# EAGLE board Battery Interface Module (EAGLE 5.12), part 1 of 3
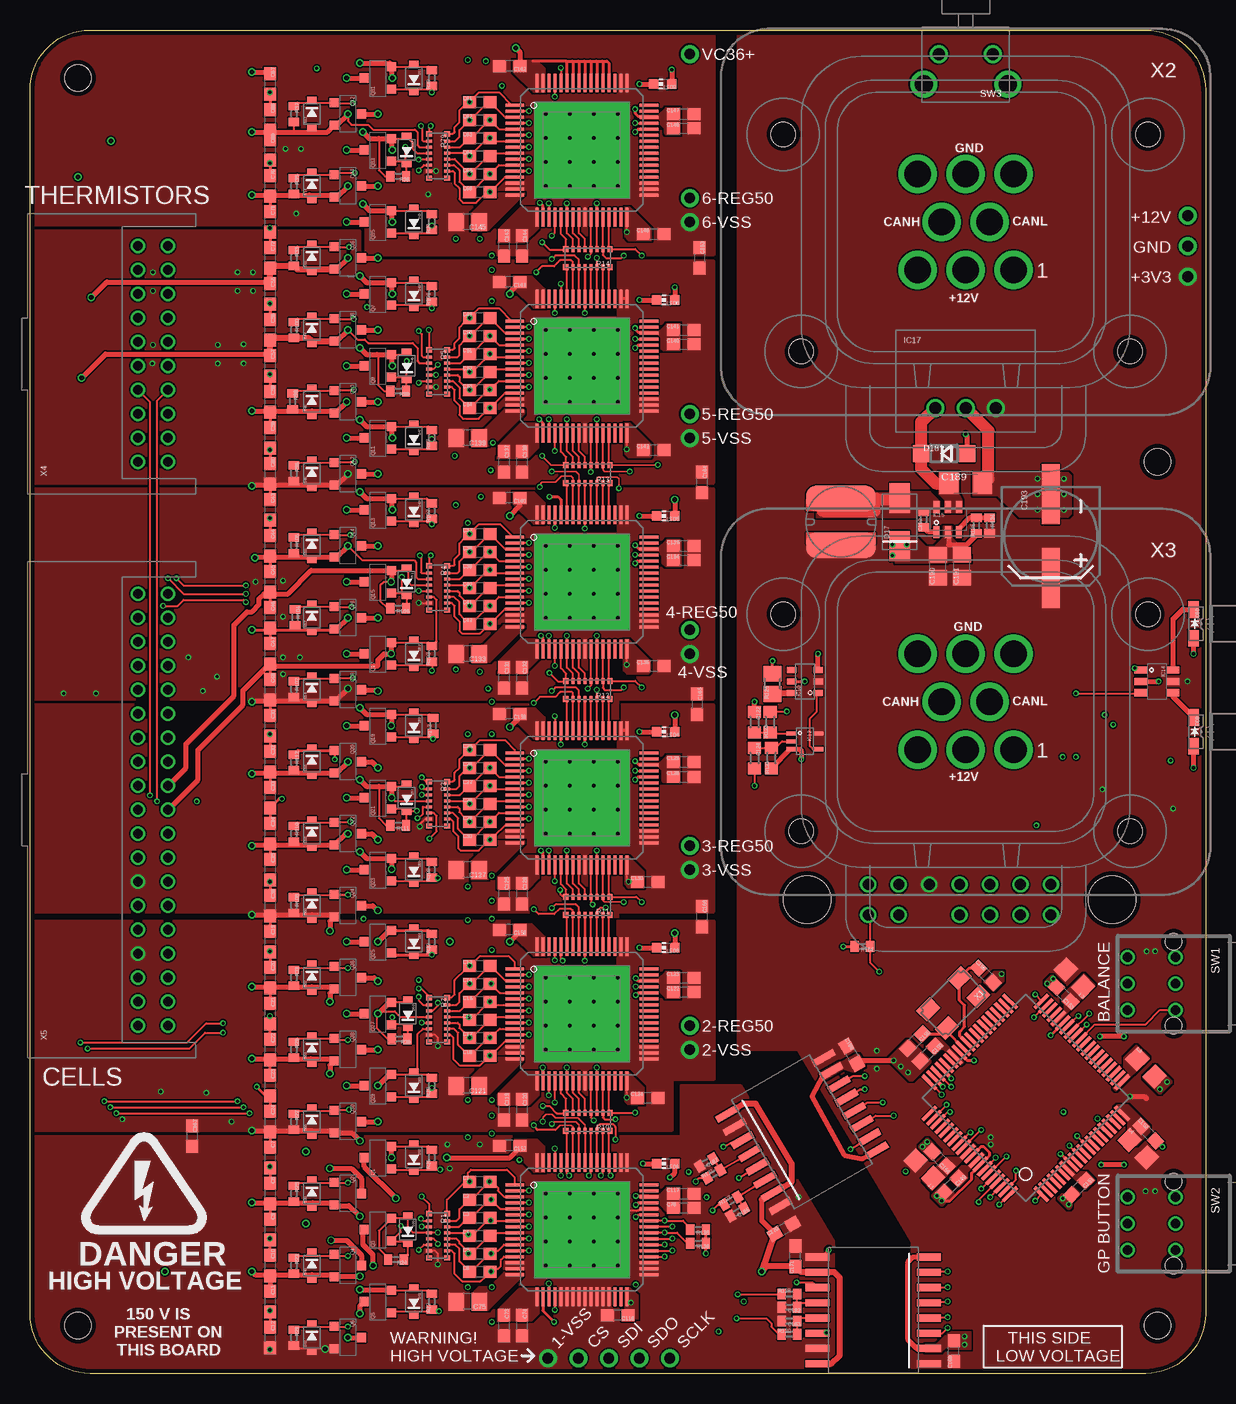
[diagram p0: board, top side]
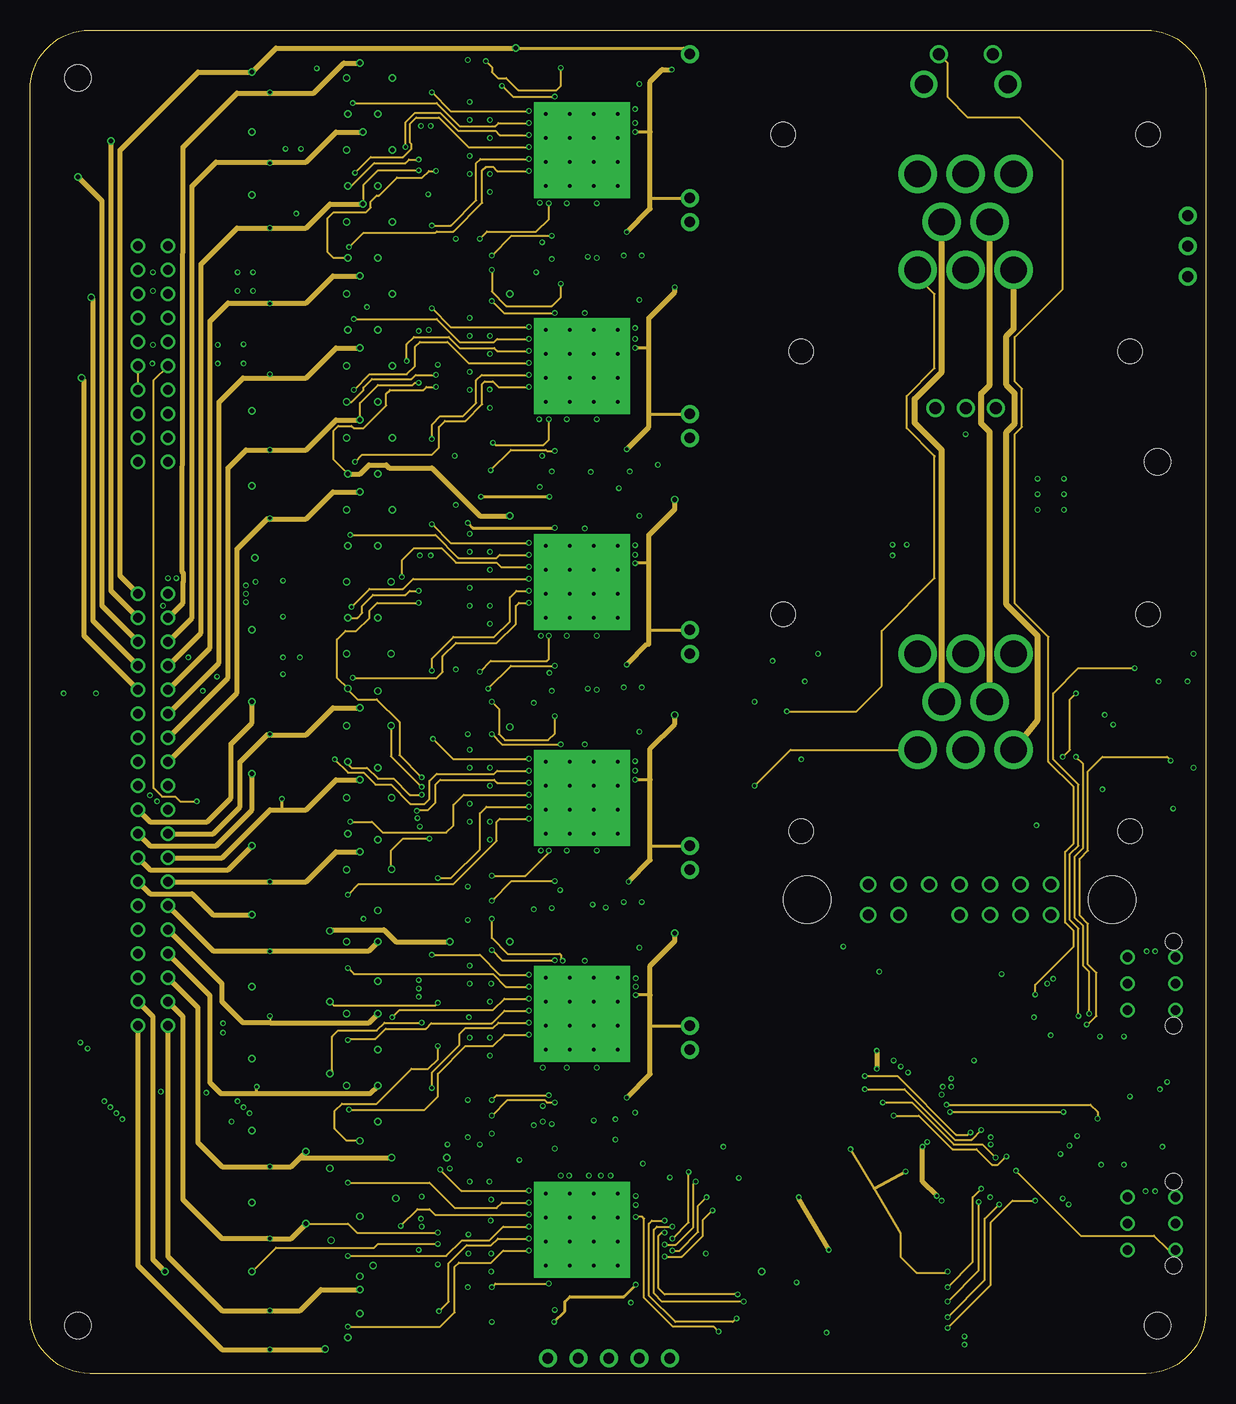
[diagram p1: board, inner layer Route2]
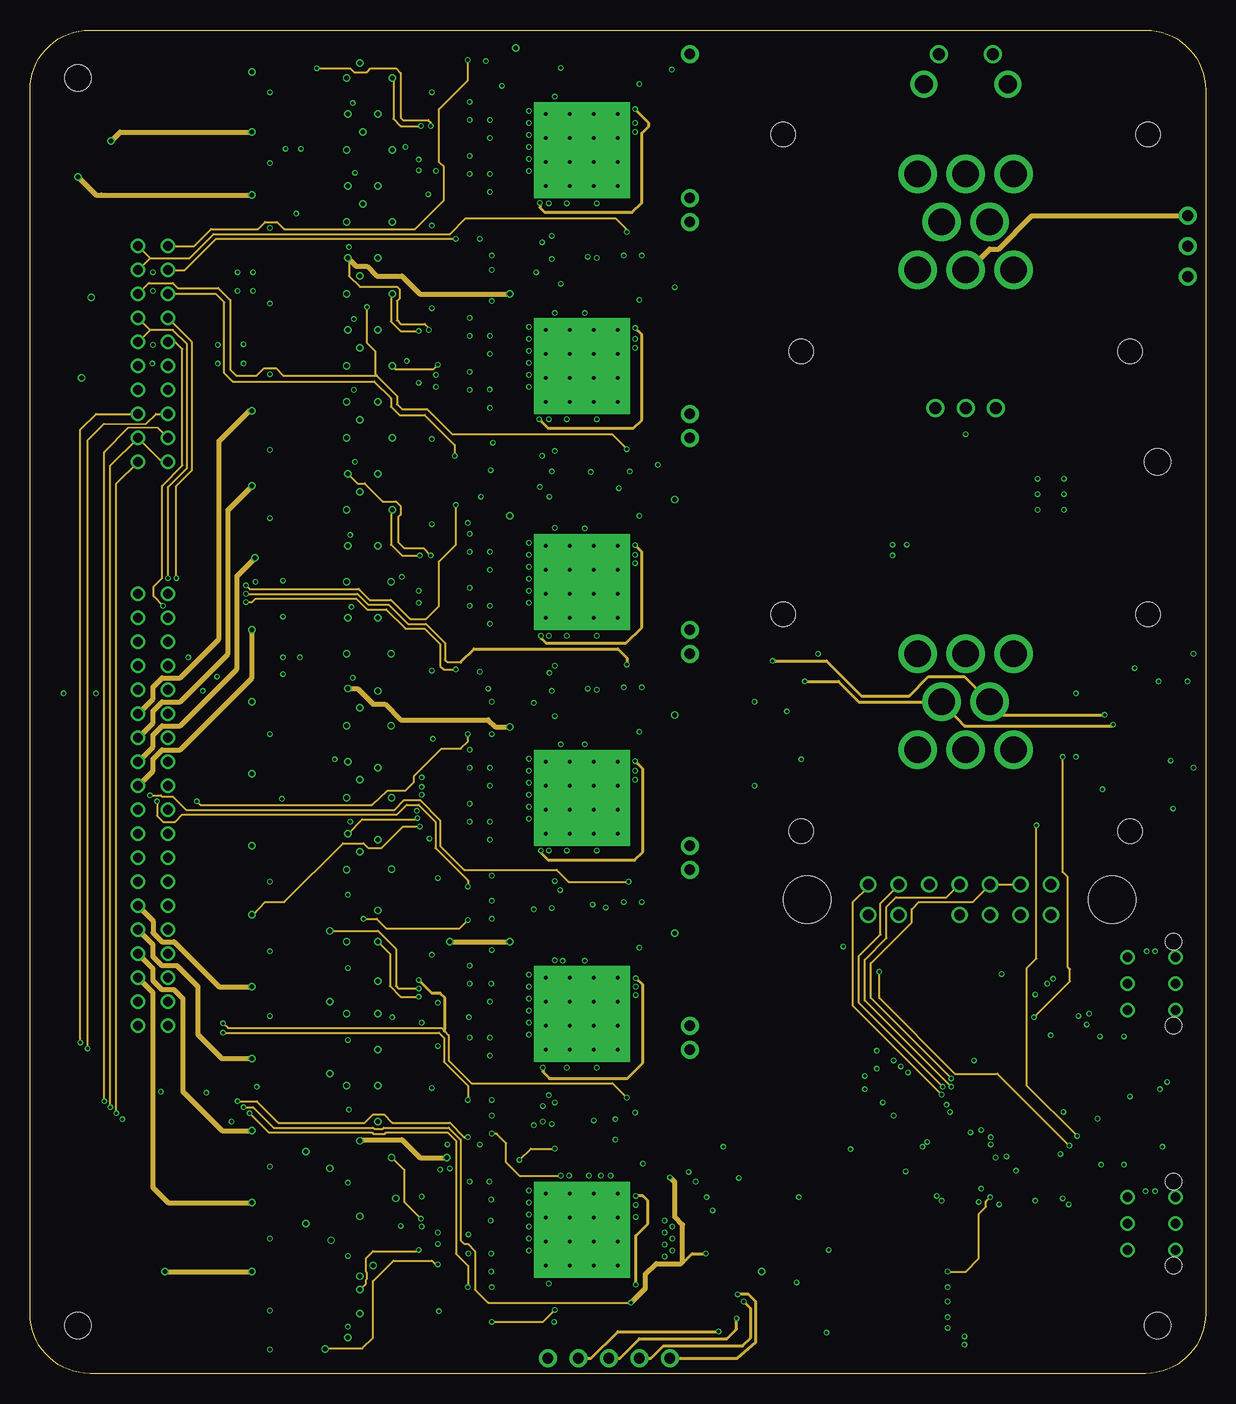
[diagram p2: board, inner layer Route15]
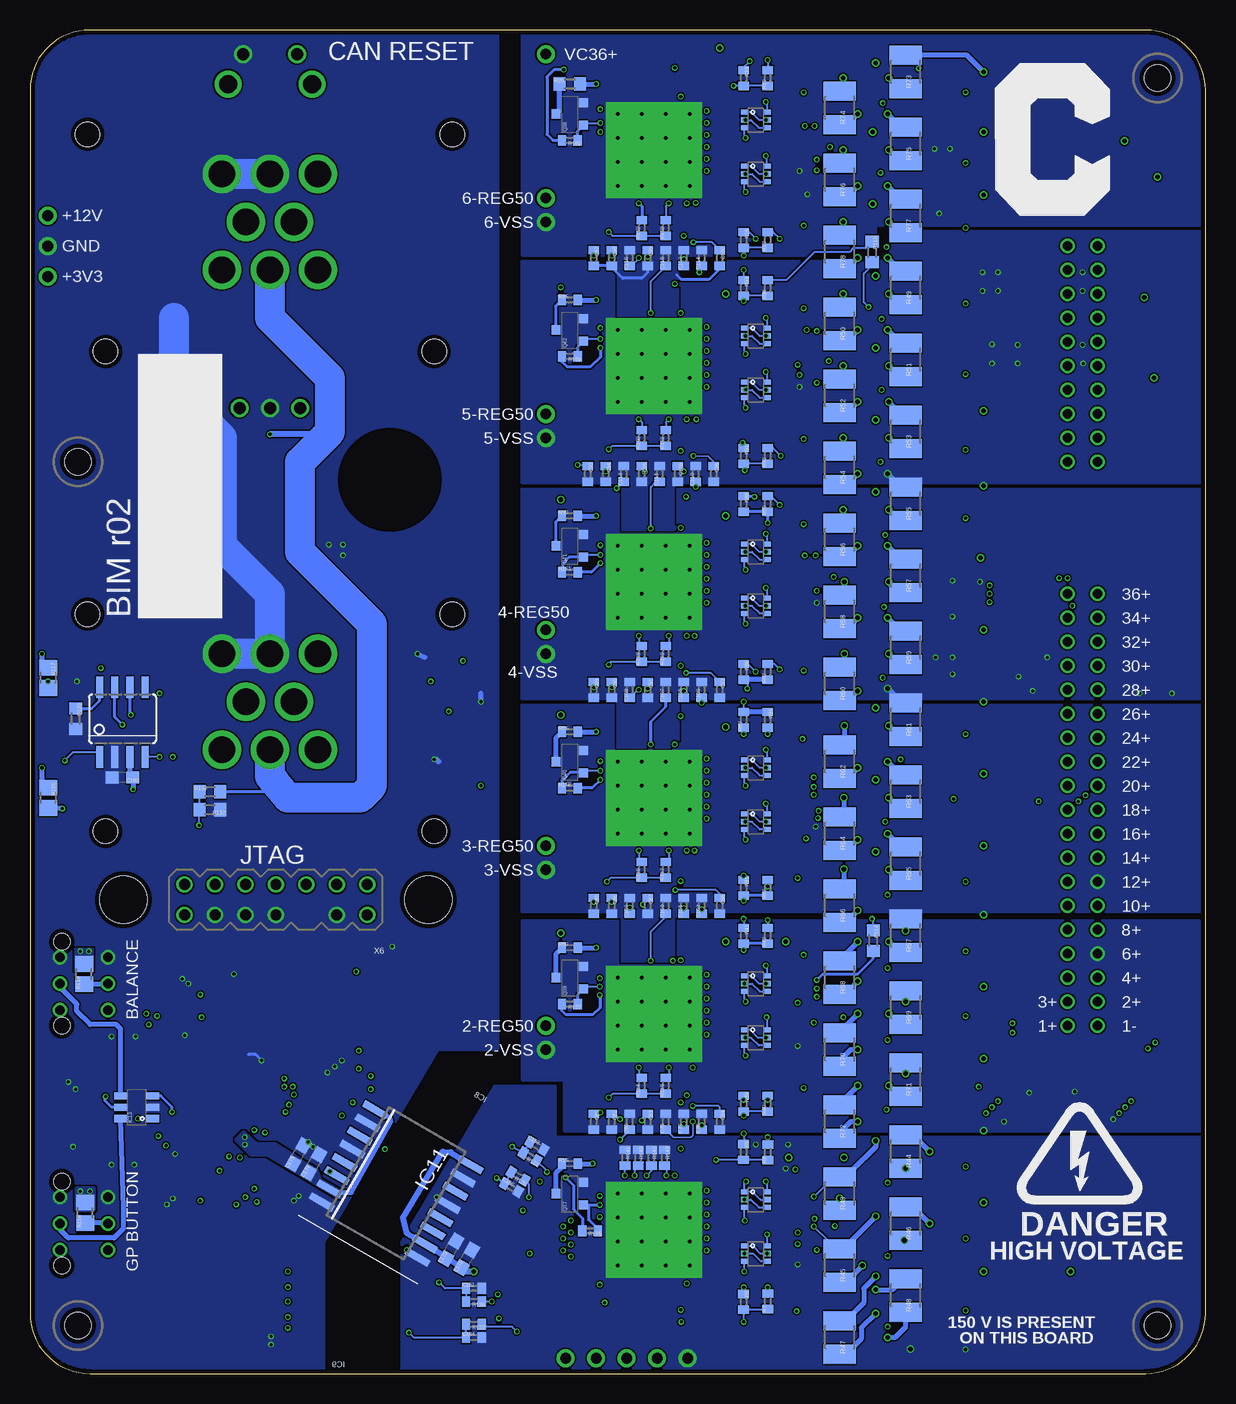
[diagram p3: board, bottom side, seen from below]

Size 98 x 112 mm. Coordinates in mm from the lower left corner, seen from the top.
Outline: 5,0 arc-90 0,5 0,107 arc-90 5,112 93,112 arc-90 98,107 98,5 arc-90 93,0 5,0
Copper layers (1+2*15+16): Top 0.0356mm / dielectric 0.1702mm / Route2 0.0178mm / dielectric 1.1938mm / Route15 0.0178mm / dielectric 0.1981mm / Bottom 0.0356mm
Design rules "OSH Park 4-layer (draft) 5-5": minimum track width 5mil, minimum drill 10mil, track to track 5mil, track to pad 5mil, pad to pad 5mil, via to via 5mil, smd to smd 5mil, copper to edge 15mil, drill to drill 8mil, minimum pad ring 4mil, minimum via ring 4mil, stop-mask expansion 4mil, vias tented up to drill 20mil, thermal gap 10mil
Holes 2.2 mm at 4,4 4,108 94,76 94,4
Holes 3.96 mm at 64.8,39.5 90.2,39.5
bKeepout: area 91,105 to 97,111; area 91,1 to 97,7; area 1,1 to 7,7; area 1,105 to 7,111
tRestrict: area 66.4,10.1 to 66.8,10.5
bRestrict: area 66.3,10 to 66.9,10.6

## Footprints (pad centres in the part's own frame; a part is rotated, then mirrored left to right if it is on the bottom)
C0603 = smd 1.1 x 1: 1 -0.85,0; 2 0.85,0
C0805 = smd 1.3 x 1.5: 1 -0.95,0; 2 0.95,0
C0402 = smd 0.7 x 0.9: 1 -0.65,0; 2 0.65,0
C1206 = smd 1.6 x 1.8: 1 -1.4,0; 2 1.4,0
175TMP-0810 = smd 5 x 1.5: + 3.5,0; - -3.5,0
SOT-363 = smd 0.42 x 0.6: 1 -0.65,-0.95; 2 0,-0.95; 3 0.65,-0.95; 4 0.65,0.95; 5 0,0.95; 6 -0.65,0.95
SOD-323 = smd 0.63 x 0.83: ANODE -1.115,0; CATHODE 1.115,0
SMA = smd 2.5 x 1.7: ANODE -2,0; CATHODE 2,0
SOD123 = smd 1.4 x 1.4: A 1.9,0; C -1.9,0
LQFP64-POWERPAD_(S-PQFP-G64) = smd 1.55 x 0.25: 1 -5.6,3.75; 2 -5.6,3.25; 3 -5.6,2.75; 4 -5.6,2.25; 5 -5.6,1.75; 6 -5.6,1.25; 7 -5.6,0.75; 8 -5.6,0.25; 9 -5.6,-0.25; 10 -5.6,-0.75; 11 -5.6,-1.25; 12 -5.6,-1.75; 13 -5.6,-2.25; 14 -5.6,-2.75; 15 -5.6,-3.25; 16 -5.6,-3.75; 33 5.6,-3.75; 34 5.6,-3.25; 35 5.6,-2.75; 36 5.6,-2.25; 37 5.6,-1.75; 38 5.6,-1.25; 39 5.6,-0.75; 40 5.6,-0.25; 41 5.6,0.25; 42 5.6,0.75; 43 5.6,1.25; 44 5.6,1.75; 45 5.6,2.25; 46 5.6,2.75; 47 5.6,3.25; 48 5.6,3.75 | smd 0.25 x 1.55: 17 -3.75,-5.6; 18 -3.25,-5.6; 19 -2.75,-5.6; 20 -2.25,-5.6; 21 -1.75,-5.6; 22 -1.25,-5.6; 23 -0.75,-5.6; 24 -0.25,-5.6; 25 0.25,-5.6; 26 0.75,-5.6; 27 1.25,-5.6; 28 1.75,-5.6; 29 2.25,-5.6; 30 2.75,-5.6; 31 3.25,-5.6; 32 3.75,-5.6; 49 3.75,5.6; 50 3.25,5.6; 51 2.75,5.6; 52 2.25,5.6; 53 1.75,5.6; 54 1.25,5.6; 55 0.75,5.6; 56 0.25,5.6; 57 -0.25,5.6; 58 -0.75,5.6; 59 -1.25,5.6; 60 -1.75,5.6; 61 -2.25,5.6; 62 -2.75,5.6; 63 -3.25,5.6; 64 -3.75,5.6
PQFP-80_(S-PQFP-G80) = smd 0.3 x 1.6: 1 -4.75,-6.6; 2 -4.25,-6.6; 3 -3.75,-6.6; 4 -3.25,-6.6; 5 -2.75,-6.6; 6 -2.25,-6.6; 7 -1.75,-6.6; 8 -1.25,-6.6; 9 -0.75,-6.6; 10 -0.25,-6.6; 11 0.25,-6.6; 12 0.75,-6.6; 13 1.25,-6.6; 14 1.75,-6.6; 15 2.25,-6.6; 16 2.75,-6.6; 17 3.25,-6.6; 18 3.75,-6.6; 19 4.25,-6.6; 20 4.75,-6.6; 41 4.75,6.6; 42 4.25,6.6; 43 3.75,6.6; 44 3.25,6.6; 45 2.75,6.6; 46 2.25,6.6; 47 1.75,6.6; 48 1.25,6.6; 49 0.75,6.6; 50 0.25,6.6; 51 -0.25,6.6; 52 -0.75,6.6; 53 -1.25,6.6; 54 -1.75,6.6; 55 -2.25,6.6; 56 -2.75,6.6; 57 -3.25,6.6; 58 -3.75,6.6; 59 -4.25,6.6; 60 -4.75,6.6 | smd 1.6 x 0.3: 21 6.6,-4.75; 22 6.6,-4.25; 23 6.6,-3.75; 24 6.6,-3.25; 25 6.6,-2.75; 26 6.6,-2.25; 27 6.6,-1.75; 28 6.6,-1.25; 29 6.6,-0.75; 30 6.6,-0.25; 31 6.6,0.25; 32 6.6,0.75; 33 6.6,1.25; 34 6.6,1.75; 35 6.6,2.25; 36 6.6,2.75; 37 6.6,3.25; 38 6.6,3.75; 39 6.6,4.25; 40 6.6,4.75; 61 -6.6,4.75; 62 -6.6,4.25; 63 -6.6,3.75; 64 -6.6,3.25; 65 -6.6,2.75; 66 -6.6,2.25; 67 -6.6,1.75; 68 -6.6,1.25; 69 -6.6,0.75; 70 -6.6,0.25; 71 -6.6,-0.25; 72 -6.6,-0.75; 73 -6.6,-1.25; 74 -6.6,-1.75; 75 -6.6,-2.25; 76 -6.6,-2.75; 77 -6.6,-3.25; 78 -6.6,-3.75; 79 -6.6,-4.25; 80 -6.6,-4.75
D_(R-PDSO-G16) = smd 2 x 0.6: 1 -4.65,4.445; 2 -4.65,3.175; 3 -4.65,1.905; 4 -4.65,0.635; 5 -4.65,-0.635; 6 -4.65,-1.905; 7 -4.65,-3.175; 8 -4.65,-4.445; 9 4.65,-4.445; 10 4.65,-3.175; 11 4.65,-1.905; 12 4.65,-0.635; 13 4.65,0.635; 14 4.65,1.905; 15 4.65,3.175; 16 4.65,4.445
SOT23-6_(RJ-6) = smd 0.5 x 0.8: 1 -0.95,-1.1; 2 0,-1.1; 3 0.95,-1.1; 4 0.95,1.1; 5 0,1.1; 6 -0.95,1.1
SO-16W = smd 0.6 x 2.2: 1 -4.445,-3.33; 2 -3.175,-3.33; 3 -1.905,-3.33; 4 -0.635,-3.33; 5 0.635,-3.33; 6 1.905,-3.33; 7 3.175,-3.33; 8 4.445,-3.33; 9 4.445,5.87; 10 3.175,5.87; 11 1.905,5.87; 12 0.635,5.87; 13 -0.635,5.87; 14 -1.905,5.87; 15 -3.175,5.87; 16 -4.445,5.87
DCK_(R-PDSO-G5) = smd 0.35 x 0.85: 1 -0.65,-1.1; 2 0,-1.1; 3 0.65,-1.1; 4 0.65,1.1; 5 -0.65,1.1
DBV_(R-PDSO-G6) = smd 0.6 x 1.05: 1 -0.95,-1.35; 2 0,-1.35; 3 0.95,-1.35; 4 0.95,1.35; 5 0,1.35; 6 -0.95,1.35
SOT-6_DDC = smd 0.5 x 1: 1 -0.95,-1.05; 2 0,-1.05; 3 0.95,-1.05; 4 0.95,1.05; 5 0,1.05; 6 -0.95,1.05
SOIC8 = smd 0.6 x 1.8: 1 0.5,-2.9; 2 1.77,-2.9; 3 3.04,-2.9; 4 4.31,-2.9; 5 4.31,2.9; 6 3.04,2.9; 7 1.77,2.9; 8 0.5,2.9
R78CXX-1.0 = drill 1 round: 1 -2.54,0; 2 0,0; 3 2.54,0
0603 = smd 1.4 x 1.5: A 1.025,0; B -1.025,0
SDR0604 = smd 5.8 x 2.1: P$1 0,1.95; P$2 0,-1.95
CHIP-LED0603 = smd 0.8 x 0.8: A 0,-0.75; C 0,0.75
SMS1105 = smd 1.4 x 0.9: ANODE 1.2,0; CATHODE -1.2,0
SOT-23 = smd 0.76 x 0.76: 1 -0.95,-1.145; 2 0.95,-1.145; 3 0,1.145
EXB-2HV102JV = smd 0.425 x 0.5: 1 -1.837,-0.75; 8 1.837,-0.75; 9 1.837,0.75; 16 -1.837,0.75 | smd 0.25 x 0.5: 2 -1.25,-0.75; 3 -0.75,-0.75; 4 -0.25,-0.75; 5 0.25,-0.75; 6 0.75,-0.75; 7 1.25,-0.75; 10 1.25,0.75; 11 0.75,0.75; 12 0.25,0.75; 13 -0.25,0.75; 14 -0.75,0.75; 15 -1.25,0.75
R0402 = smd 0.7 x 0.9: 1 -0.65,0; 2 0.65,0
R0603 = smd 1 x 1.1: 1 -0.85,0; 2 0.85,0
R1210 = smd 1.6 x 2.7: 1 -1.4,0; 2 1.4,0
R0805 = smd 1.3 x 1.5: 1 -0.85,0; 2 0.85,0
TL1290 = drill 0.8 round: 1 2.2,-4; 2 2.2,0; 3 -2.2,-4; 4 -2.2,0; 5 0,-4; 6 0,0 | hole 1.35: 3.5,-0.15; -3.5,-0.15
B3F-3XXX = drill 1 round: 1 -2.25,0; 2 2.25,0 | drill 1.5 round: 3 -3.5,2.5; 4 3.5,2.5
ECX-53B = smd 1.6 x 1.25: 1 -1.85,-1.1; 2 1.85,-1.1; 3 1.85,1.1; 4 -1.85,1.1
776276-1_AMPSEAL_8_VERT = drill 2.2 round: 1 -4,4; 2 0,4; 3 4,4; 4 -2,0; 5 2,0; 6 -4,-4; 7 0,-4; 8 4,-4 | hole 2: -13.7,10.8; 13.7,10.8; -15.2,-7.3; 15.2,-7.3
MICROCLASP-20-DUAL-RA = drill 0.8 round: 1 -9,0; 2 -7,0; 3 -5,0; 4 -3,0; 5 -1,0; 6 1,0; 7 3,0; 8 5,0; 9 7,0; 10 9,0; 11 -9,-2.5; 12 -7,-2.5; 13 -5,-2.5; 14 -3,-2.5; 15 -1,-2.5; 16 1,-2.5; 17 3,-2.5; 18 5,-2.5; 19 7,-2.5; 20 9,-2.5
MICROCLASP-38-DUAL-RA = drill 0.8 round: 1 -18,0; 2 -16,0; 3 -14,0; 4 -12,0; 5 -10,0; 6 -8,0; 7 -6,0; 8 -4,0; 9 -2,0; 10 0,0; 11 2,0; 12 4,0; 13 6,0; 14 8,0; 15 10,0; 16 12,0; 17 14,0; 18 16,0; 19 18,0; 20 -18,-2.5; 21 -16,-2.5; 22 -14,-2.5; 23 -12,-2.5; 24 -10,-2.5; 25 -8,-2.5; 26 -6,-2.5; 27 -4,-2.5; 28 -2,-2.5; 29 0,-2.5; 30 2,-2.5; 31 4,-2.5; 32 6,-2.5; 33 8,-2.5; 34 10,-2.5; 35 12,-2.5; 36 14,-2.5; 37 16,-2.5; 38 18,-2.5
TI_JTAG_HEADER = drill 0.914 round: 1 -7.62,-1.27; 2 -7.62,1.27; 3 -5.08,-1.27; 4 -5.08,1.27; 5 -2.54,-1.27; 7 0,-1.27; 8 0,1.27; 9 2.54,-1.27; 10 2.54,1.27; 11 5.08,-1.27; 12 5.08,1.27; 13 7.62,-1.27; 14 7.62,1.27

## Placement (x,y rotation side)
C1  0.1 uF 50V  [C0603]  37.5,16 0 top
C2  0.1 uF 50V  [C0603]  37.5,14.5 0 top
C3  0.1 uF 50V  [C0603]  37.5,13 0 top
C4  0.1 uF 50V  [C0603]  37.5,11.5 0 top
C5  0.1 uF 50V  [C0603]  37.5,10 0 top
C6  0.1 uF 50V  [C0603]  37.5,8.5 0 top
C7  0.1 uF 50V  [C0603]  20,18 270 top
C8  0.1 uF 50V  [C0603]  20,15 270 top
C9  0.1 uF 50V  [C0603]  20,12 270 top
C10  0.1 uF 50V  [C0603]  20,9 270 top
C11  0.1 uF 50V  [C0603]  20,6 270 top
C12  0.1 uF 50V  [C0603]  20,3 270 top
C13  0.1 uF 50V  [C0603]  37.5,34 0 top
C14  0.1 uF 50V  [C0603]  37.5,32.5 0 top
C15  0.1 uF 50V  [C0603]  37.5,31 0 top
C16  0.1 uF 50V  [C0603]  37.5,29.5 0 top
C17  0.1 uF 50V  [C0603]  37.5,28 0 top
C18  0.1 uF 50V  [C0603]  37.5,26.5 0 top
C19  0.1 uF 50V  [C0603]  20,36 270 top
C20  0.1 uF 50V  [C0603]  20,33 270 top
C21  0.1 uF 50V  [C0603]  20,30 270 top
C22  0.1 uF 50V  [C0603]  20,27 270 top
C23  0.1 uF 50V  [C0603]  20,24 270 top
C24  0.1 uF 50V  [C0603]  20,21 270 top
C25  0.1 uF 50V  [C0603]  37.5,52 0 top
C26  0.1 uF 50V  [C0603]  37.5,50.5 0 top
C27  0.1 uF 50V  [C0603]  37.5,49 0 top
C28  0.1 uF 50V  [C0603]  37.5,47.5 0 top
C29  0.1 uF 50V  [C0603]  37.5,46 0 top
C30  0.1 uF 50V  [C0603]  37.5,44.5 0 top
C31  0.1 uF 50V  [C0603]  20,54 270 top
C32  0.1 uF 50V  [C0603]  20,51 270 top
C33  0.1 uF 50V  [C0603]  20,48 270 top
C34  0.1 uF 50V  [C0603]  20,45 270 top
C35  0.1 uF 50V  [C0603]  20,42 270 top
C36  0.1 uF 50V  [C0603]  20,39 270 top
C37  0.1 uF 50V  [C0603]  37.5,70 0 top
C38  0.1 uF 50V  [C0603]  37.5,68.5 0 top
C39  0.1 uF 50V  [C0603]  37.5,67 0 top
C40  0.1 uF 50V  [C0603]  37.5,65.5 0 top
C41  0.1 uF 50V  [C0603]  37.5,64 0 top
C42  0.1 uF 50V  [C0603]  37.5,62.5 0 top
C43  0.1 uF 50V  [C0603]  20,72 270 top
C44  0.1 uF 50V  [C0603]  20,69 270 top
C45  0.1 uF 50V  [C0603]  20,66 270 top
C46  0.1 uF 50V  [C0603]  20,63 270 top
C47  0.1 uF 50V  [C0603]  20,60 270 top
C48  0.1 uF 50V  [C0603]  20,57 270 top
C49  0.1 uF 50V  [C0603]  37.5,88 0 top
C50  0.1 uF 50V  [C0603]  37.5,86.5 0 top
C51  0.1 uF 50V  [C0603]  37.5,85 0 top
C52  0.1 uF 50V  [C0603]  37.5,83.5 0 top
C53  0.1 uF 50V  [C0603]  37.5,82 0 top
C54  0.1 uF 50V  [C0603]  37.5,80.5 0 top
C55  0.1 uF 50V  [C0603]  20,90 270 top
C56  0.1 uF 50V  [C0603]  20,87 270 top
C57  0.1 uF 50V  [C0603]  20,84 270 top
C58  0.1 uF 50V  [C0603]  20,81 270 top
C59  0.1 uF 50V  [C0603]  20,78 270 top
C60  0.1 uF 50V  [C0603]  20,75 270 top
C61  0.1 uF 50V  [C0603]  37.5,106 0 top
C62  0.1 uF 50V  [C0603]  37.5,104.5 0 top
C63  0.1 uF 50V  [C0603]  37.5,103 0 top
C64  0.1 uF 50V  [C0603]  37.5,101.5 0 top
C65  0.1 uF 50V  [C0603]  37.5,100 0 top
C66  0.1 uF 50V  [C0603]  37.5,98.5 0 top
C67  0.1 uF 50V  [C0603]  20,107.5 270 top
C68  0.1 uF 50V  [C0603]  20,104.5 270 top
C69  0.1 uF 50V  [C0603]  20,102 270 top
C70  0.1 uF 50V  [C0603]  20,99 270 top
C71  0.1 uF 50V  [C0603]  20,96 270 top
C72  0.1 uF 50V  [C0603]  20,93 270 top
C73  2.2u  [C0603]  39.5,4 270 top
C74  0.1u  [C0603]  41,4 270 top
C75  10u 10V  [C0805]  36.5,6 180 top
C76  2.2u  [C0603]  54.5,13.8 0 top
C77  33 pF  [C0402]  43.5,21 90 bottom
C78  33 pF  [C0402]  42,21 90 bottom
C79  33 pF  [C0402]  45,21 90 bottom
C80  33 pF  [C0402]  48,21 90 bottom
C81  33 pF  [C0402]  51,21 270 bottom
C82  33 pF  [C0402]  49.5,21 270 bottom
C83  33 pF  [C0402]  46.5,21 270 bottom
C84  33 pF  [C0402]  40.5,21 270 bottom
C85  33 pF  [C0402]  51,39 270 bottom
C86  33 pF  [C0402]  49.5,39 270 bottom
C87  33 pF  [C0402]  46.5,39 270 bottom
C88  33 pF  [C0402]  40.5,39 270 bottom
C89  33 pF  [C0402]  51,57 270 bottom
C90  33 pF  [C0402]  49.5,57 270 bottom
C91  33 pF  [C0402]  46.5,57 270 bottom
C92  33 pF  [C0402]  40.5,57 270 bottom
C93  33 pF  [C0402]  51.5,75 270 bottom
C94  33 pF  [C0402]  50,75 270 bottom
C95  33 pF  [C0402]  47,75 270 bottom
C96  33 pF  [C0402]  41,75 270 bottom
C97  33 pF  [C0402]  51,93 270 bottom
C98  33 pF  [C0402]  49.5,93 270 bottom
C99  33 pF  [C0402]  46.5,93 270 bottom
C100  33 pF  [C0402]  40.5,93 270 bottom
C101  33 pF  [C0402]  43.5,39 90 bottom
C102  33 pF  [C0402]  42,39 90 bottom
C103  33 pF  [C0402]  45,39 90 bottom
C104  33 pF  [C0402]  48,39 90 bottom
C105  33 pF  [C0402]  43.5,57 90 bottom
C106  33 pF  [C0402]  42,57 90 bottom
C107  33 pF  [C0402]  45,57 90 bottom
C108  33 pF  [C0402]  48,57 90 bottom
C109  33 pF  [C0402]  44,75 270 bottom
C110  33 pF  [C0402]  42.5,75 90 bottom
C111  33 pF  [C0402]  45.5,75 90 bottom
C112  33 pF  [C0402]  48.5,75 90 bottom
C113  33 pF  [C0402]  43.5,93 90 bottom
C114  33 pF  [C0402]  42,93 90 bottom
C115  33 pF  [C0402]  45,93 90 bottom
C116  33 pF  [C0402]  48,93 90 bottom
C117  0.1u  [C0603]  54.5,15 0 top
C118  2.2u  [C0603]  49,4.85 180 top
C119  2.2u  [C0603]  39.5,22 270 top
C120  0.1u  [C0603]  41,22 270 top
C121  10u 10V  [C0805]  36.5,24 180 top
C122  2.2u  [C0603]  54.5,31.8 0 top
C123  0.1u  [C0603]  54.5,33 0 top
C124  2.2u  [C0603]  51.5,23 0 top
C125  2.2u  [C0603]  39.5,40 270 top
C126  0.1u  [C0603]  41,40 270 top
C127  10u 10V  [C0805]  36.5,42 180 top
C128  2.2u  [C0603]  54.5,49.75 0 top
C129  0.1u  [C0603]  54.5,51 0 top
C130  2.2u  [C0603]  51.5,41 0 top
C131  2.2u  [C0603]  39.5,58 270 top
C132  0.1u  [C0603]  41,58 270 top
C133  10u 10V  [C0805]  36.5,60 180 top
C134  2.2u  [C0603]  54.5,67.8 0 top
C135  0.1u  [C0603]  54.5,69 0 top
C136  2.2u  [C0603]  52,59 0 top
C137  2.2u  [C0603]  39.5,76 270 top
C138  0.1u  [C0603]  41,76 270 top
C139  10u 10V  [C0805]  36.5,78 180 top
C140  2.2u  [C0603]  54.5,85.8 0 top
C141  0.1u  [C0603]  54.5,87 0 top
C142  2.2u  [C0603]  52,77 0 top
C143  2.2u  [C0603]  39.5,94 270 top
C144  0.1u  [C0603]  41,94 270 top
C145  10u 10V  [C0805]  36.5,96 180 top
C146  2.2u  [C0603]  54.5,103.8 0 top
C147  0.1u  [C0603]  54.5,105 0 top
C148  2.2u  [C0603]  52,95 0 top
C149  2.2 uF  [C0603]  76.8,15.67 225 top
C150  2.2 uF  [C0603]  74.84,26.66 225 top
C151  2.2 uF  [C0603]  87.43,15.48 225 top
C152  2.2 uF  [C0603]  93.23,20.01 315 top
C153  2.2 uF  [C0603]  86.16,31.61 135 top
C154  2.2 uF  [C0603]  75.83,17.89 135 top
C155  8 pF  [C0603]  73.78,27.72 225 top
C156  8 pF  [C0603]  79.69,33.2 315 top
C157  0.1u  [C0603]  40,19 180 top
C158  0.1u  [C0603]  40,37 180 top
C159  0.1u  [C0603]  40,55 180 top
C160  0.1u  [C0603]  40,73 180 top
C161  0.1u  [C0603]  40,91 180 top
C162  0.1u  [C0603]  40,109 180 top
C163  0.001 uF 50V  [C0603]  55.8,93 270 top
C164  0.001 uF 50V  [C0603]  56,74.3 270 top
C165  0.001 uF 50V  [C0603]  55.6,55.8 270 top
C166  0.001 uF 50V  [C0603]  56,38.1 270 top
C167  0.001 uF 50V  [C0603]  13.5,19.8 270 top
C168  0.1 uF  [C0603]  68.5,26.56 300 top
C169  0.1 uF  [C0603]  77,1.87 90 top
C170  0.1 uF  [C0603]  62.84,12.05 30 top
C171  0.1 uF  [C0603]  63.8,9.77 90 top
C172  0.1 uF  [C0603]  61.59,9.57 60 bottom
C173  10 uF  [C0603]  62.89,10.32 60 bottom
C174  10 uF  [C0603]  74.33,17.5 60 bottom
C175  0.1 uF  [C0603]  75.63,18.25 60 bottom
C180  2.2 uF  [C0603]  90.3,49.7 180 bottom
C181  DNP  [C0402]  61,7.1 0 bottom
C182  DNP  [C0402]  63.3,5.52 180 top
C183  DNP  [C0402]  63.3,4.37 180 top
C184  DNP  [C0402]  61,3 0 bottom
C185  DNP  [C0402]  58.99,13.45 210 top
C186  DNP  [C0402]  57.87,15.5 330 bottom
C187  DNP  [C0402]  56.4,17.6 210 top
C188  DNP  [C0402]  55.74,18.98 330 bottom
C189  1 uF 25V  [C1206]  78,74.2 0 top
C190  22 uF  [C0805]  75.7,67.3 90 top
C191  22 uF  [C0805]  77.7,67.3 90 top
C192  150 nF  [C0402]  74.5,71.2 90 top
C193  big  [175TMP-0810]  85.1,69.8 270 top
D1  [SOT-363]  37.5,86.5 270 bottom
D2  [SOT-363]  37.5,82 270 bottom
D3  [SOT-363]  37.5,68.5 270 bottom
D4  [SOT-363]  37.5,64 270 bottom
D5  [SOT-363]  37.5,50.5 270 bottom
D6  [SOT-363]  37.5,46 270 bottom
D7  [SOT-363]  37.5,32.5 270 bottom
D8  [SOT-363]  37.5,28 270 bottom
D9  [SOT-363]  37.5,14.5 270 bottom
D10  [SOT-363]  37.5,10 270 bottom
D11  [SOD-323]  32,108 270 top
D12  [SOD-323]  23.5,105 90 top
D13  [SOD-323]  31.4,102 270 top
D14  [SOD-323]  23.5,99 90 top
D15  [SOD-323]  32,96 270 top
D16  [SOD-323]  23.5,93 90 top
D17  [SMA]  72.5,71 90 top
D18  [SOD123]  76.2,76.7 0 top
D37  5.1V  [SOD-323]  32,18 270 top
D38  5.1V  [SOD-323]  23.5,15 90 top
D39  5.1V  [SOD-323]  31.5,12 270 top
D40  5.1V  [SOD-323]  23.5,9 90 top
D41  5.1V  [SOD-323]  32,6 270 top
D42  5.1V  [SOD-323]  23.5,3 90 top
D43  5.1V  [SOD-323]  32,90 270 top
D44  5.1V  [SOD-323]  23.5,87 90 top
D45  5.1V  [SOD-323]  31.4,84 270 top
D46  5.1V  [SOD-323]  23.5,81 90 top
D47  5.1V  [SOD-323]  32,78 270 top
D48  5.1V  [SOD-323]  23.5,75 90 top
D49  5.1V  [SOD-323]  32,72 270 top
D50  5.1V  [SOD-323]  23.5,69 90 top
D51  5.1V  [SOD-323]  31.4,66 270 top
D52  5.1V  [SOD-323]  23.5,63 90 top
D53  5.1V  [SOD-323]  32,60 270 top
D54  5.1V  [SOD-323]  23.5,57 90 top
D55  5.1V  [SOD-323]  32,54 270 top
D56  5.1V  [SOD-323]  23.5,51 90 top
D57  5.1V  [SOD-323]  31.4,48 270 top
D58  5.1V  [SOD-323]  23.5,45 90 top
D59  5.1V  [SOD-323]  32,42 270 top
D60  5.1V  [SOD-323]  23.5,39 90 top
D61  5.1V  [SOD-323]  32,36 270 top
D62  5.1V  [SOD-323]  23.5,33 90 top
D63  5.1V  [SOD-323]  31.5,30 270 top
D64  5.1V  [SOD-323]  23.5,27 90 top
D65  5.1V  [SOD-323]  32,24 270 top
D66  5.1V  [SOD-323]  23.5,21 90 top
D73  [SOT-363]  37.5,104.5 270 bottom
D74  [SOT-363]  37.5,100 270 bottom
IC1  BQ76PL536  [LQFP64-POWERPAD_(S-PQFP-G64)]  46,12 0 top
IC2  BQ76PL536  [LQFP64-POWERPAD_(S-PQFP-G64)]  46,30 0 top
IC3  BQ76PL536  [LQFP64-POWERPAD_(S-PQFP-G64)]  46,48 0 top
IC4  BQ76PL536  [LQFP64-POWERPAD_(S-PQFP-G64)]  46,66 0 top
IC5  BQ76PL536  [LQFP64-POWERPAD_(S-PQFP-G64)]  46,84 0 top
IC6  BQ76PL536  [LQFP64-POWERPAD_(S-PQFP-G64)]  46,102 0 top
IC7  TMS320F28034PNT  [PQFP-80_(S-PQFP-G80)]  83.02,22.98 45 top
IC8  ISO7241  [D_(R-PDSO-G16)]  64.36,20.13 30 top
IC9  ISO7241  [D_(R-PDSO-G16)]  70.3,5.27 180 top
IC10  ADG719  [SOT23-6_(RJ-6)]  64.6,57.7 90 top
IC11  ADUM5000  [SO-16W]  68.57,16.48 240 bottom
IC12  SN74AHC1G86  [DCK_(R-PDSO-G5)]  64.6,52.7 270 top
IC13  SN74LVCG207DBV  [DBV_(R-PDSO-G6)]  89.1,22.2 90 bottom
IC14  SN74LVCG207DBV  [DBV_(R-PDSO-G6)]  93.95,57.7 270 top
IC15  LMR14206  [SOT-6_DDC]  76.5,71.2 0 top
IC16  SN65HVD230  [SOIC8]  92.7,54.3 0 bottom
IC17  R-78C3.3-1.0  [R78CXX-1.0]  78,80.5 0 top
L1  [0603]  74.56,17.04 135 top
L2  [0603]  87.08,32.95 135 top
L3  [0603]  93.04,25.49 315 top
L4  [0603]  92.38,18.74 315 top
L5  18 uH  [SDR0604]  67.6,71 0 top
LED1  [CHIP-LED0603]  53,17.5 90 top
LED2  [CHIP-LED0603]  52.75,107.5 90 top
LED3  [CHIP-LED0603]  53,35.5 90 top
LED4  [CHIP-LED0603]  53,53.5 90 top
LED5  [CHIP-LED0603]  53,71.5 90 top
LED6  [CHIP-LED0603]  53,89.5 90 top
LED9  LED1  [SMS1105]  97,53.5 270 top
LED10  LED0  [SMS1105]  97,62.5 270 top
Q1  [SOT-23]  29,18 90 top
Q2  [SOT-23]  26.5,15 270 top
Q3  [SOT-23]  29,12 90 top
Q4  [SOT-23]  26.5,9 270 top
Q5  [SOT-23]  29,6 90 top
Q6  [SOT-23]  26.5,3 270 top
Q7  [SOT-23]  29,90 90 top
Q8  [SOT-23]  26.5,87 270 top
Q9  [SOT-23]  29,84 90 top
Q10  [SOT-23]  26.5,81 270 top
Q11  [SOT-23]  29,78 90 top
Q12  [SOT-23]  26.5,75 270 top
Q13  [SOT-23]  29,72 90 top
Q14  [SOT-23]  26.5,69 270 top
Q15  [SOT-23]  29,66 90 top
Q16  [SOT-23]  26.5,63 270 top
Q17  [SOT-23]  29,60 90 top
Q18  [SOT-23]  26.5,57 270 top
Q19  [SOT-23]  29,54 90 top
Q20  [SOT-23]  26.5,51 270 top
Q21  [SOT-23]  29,48 90 top
Q22  [SOT-23]  26.5,45 270 top
Q23  [SOT-23]  29,42 90 top
Q24  [SOT-23]  26.5,39 270 top
Q25  [SOT-23]  29,36 90 top
Q26  [SOT-23]  26.5,33 270 top
Q27  [SOT-23]  29,30 90 top
Q28  [SOT-23]  26.5,27 270 top
Q29  [SOT-23]  29,24 90 top
Q30  [SOT-23]  26.5,21 270 top
Q31  [SOT-23]  29,108 90 top
Q32  [SOT-23]  26.5,105 270 top
Q33  [SOT-23]  29,102 90 top
Q34  [SOT-23]  26.5,99 270 top
Q35  [SOT-23]  29,96 90 top
Q36  [SOT-23]  26.5,93 270 top
Q37  [SOT-23]  53,15 90 bottom
Q38  [SOT-23]  53,105 90 bottom
Q39  [SOT-23]  53,33 90 bottom
Q40  [SOT-23]  53,51 90 bottom
Q41  [SOT-23]  53,69 90 bottom
Q42  [SOT-23]  53,87 90 bottom
R1  1k  [EXB-2HV102JV]  34,11.5 270 top
R2  1k  [EXB-2HV102JV]  34,29.5 270 top
R3  1k  [EXB-2HV102JV]  34,47.5 270 top
R4  1k  [EXB-2HV102JV]  34,65.5 270 top
R5  1k  [EXB-2HV102JV]  34,83.5 270 top
R6  1.82k  [R0402]  38.51,5.98 270 bottom
R7  1.47k  [R0402]  36.49,6.03 90 bottom
R8  1.82k  [R0402]  38.51,18.46 270 bottom
R9  1.47k  [R0402]  36.49,18.45 90 bottom
R10  [EXB-2HV102JV]  46.5,21 180 top
R11  [EXB-2HV102JV]  46.5,39 180 top
R12  [EXB-2HV102JV]  46.5,57 180 top
R13  [EXB-2HV102JV]  46.5,75 180 top
R14  [EXB-2HV102JV]  46.5,93 180 top
R15  1.47k  [R0402]  53,17.5 0 bottom
R16  1.82k  [R0402]  38.5,94.5 270 bottom
R17  1.47k  [R0402]  36.5,94.5 90 bottom
R18  1.82k  [R0402]  38.5,108 270 bottom
R19  1.47k  [R0402]  36.5,108 90 bottom
R20  1.47k  [R0603]  53,107.5 0 bottom
R21  1M  [R0402]  22,3 270 top
R22  1M  [R0402]  33.5,6 90 top
R23  1M  [R0402]  22,9 270 top
R24  1M  [R0402]  30.5,9.5 180 top
R25  1M  [R0402]  22,15 270 top
R26  1M  [R0402]  33.5,18 90 top
R27  1M  [R0402]  22,21 270 top
R28  1M  [R0402]  33.5,24 90 top
R29  1M  [R0402]  22,27 270 top
R30  1M  [R0402]  30.8,27.9 180 top
R31  1M  [R0402]  22,33 270 top
R32  1M  [R0402]  33.5,36 90 top
R33  1M  [R0402]  22,93 270 top
R34  1M  [R0402]  33.5,96 90 top
R35  1M  [R0402]  22,99 270 top
R36  1M  [R0402]  30.7,99.8 180 top
R37  1M  [R0402]  22,105 270 top
R38  1M  [R0402]  33.5,108 90 top
R39  1.82k  [R0402]  38.5,22.5 270 bottom
R40  1.47k  [R0402]  36.5,22.5 90 bottom
R41  1.82k  [R0402]  38.5,36.5 270 bottom
R42  1.47k  [R0402]  36.5,36.5 90 bottom
R43  47  [R1210]  30.5,15 90 bottom
R44  47  [R1210]  25,18.5 90 bottom
R45  47  [R1210]  30.5,9 90 bottom
R46  47  [R1210]  25,12.5 90 bottom
R47  47  [R1210]  30.5,3 90 bottom
R48  47  [R1210]  25,6.5 90 bottom
R49  47  [R1210]  25,90.5 90 bottom
R50  47  [R1210]  30.5,87.5 90 bottom
R51  47  [R1210]  25,84.5 90 bottom
R52  47  [R1210]  30.5,81.5 90 bottom
R53  47  [R1210]  25,78.5 90 bottom
R54  47  [R1210]  30.5,75.5 90 bottom
R55  47  [R1210]  25,72.5 90 bottom
R56  47  [R1210]  30.5,69.5 90 bottom
R57  47  [R1210]  25,66.5 90 bottom
R58  47  [R1210]  30.5,63.5 90 bottom
R59  47  [R1210]  25,60.5 90 bottom
R60  47  [R1210]  30.5,57.5 90 bottom
R61  47  [R1210]  25,54.5 90 bottom
R62  47  [R1210]  30.5,51 90 bottom
R63  47  [R1210]  25,48.5 90 bottom
R64  47  [R1210]  30.5,45 90 bottom
R65  47  [R1210]  25,42.5 90 bottom
R66  47  [R1210]  30.5,39 90 bottom
R67  47  [R1210]  25,36.5 90 bottom
R68  47  [R1210]  30.5,33 90 bottom
R69  47  [R1210]  25,30.5 90 bottom
R70  47  [R1210]  30.5,27 90 bottom
R71  47  [R1210]  25,24.5 90 bottom
R72  47  [R1210]  30.5,21 90 bottom
R73  47  [R1210]  25,108.5 90 bottom
R74  47  [R1210]  30.5,105.5 90 bottom
R75  47  [R1210]  25,102.5 90 bottom
R76  47  [R1210]  30.5,99.5 90 bottom
R77  47  [R1210]  25,96.5 90 bottom
R78  47  [R1210]  30.5,93.5 90 bottom
R79  1k  [EXB-2HV102JV]  34,101.5 270 top
R80  1.47k  [R0402]  53,35.5 0 bottom
R81  1.82k  [R0402]  38.5,40.5 270 bottom
R82  1.47k  [R0402]  36.5,40.5 90 bottom
R83  1.82k  [R0402]  38.5,54.5 90 bottom
R84  1.47k  [R0402]  36.5,54.5 270 bottom
R85  1.47k  [R0402]  53,53.5 0 bottom
R86  1.82k  [R0402]  38.5,58.5 270 bottom
R87  1.47k  [R0402]  36.5,58.5 90 bottom
R88  1.82k  [R0402]  38.5,72.5 270 bottom
R89  1.47k  [R0402]  36.5,72.5 90 bottom
R90  1.47k  [R0402]  53,71.5 0 bottom
R91  1.82k  [R0402]  38.5,76.5 270 bottom
R92  1.47k  [R0402]  36.5,76.5 90 bottom
R93  1.82k  [R0402]  38.5,90.5 270 bottom
R94  1.47k  [R0402]  36.5,90.5 90 bottom
R95  1.47k  [R0402]  53,89.5 0 bottom
R96  1M  [R0402]  22,75.05 270 top
R97  1M  [R0402]  33.5,78 90 top
R98  1M  [R0402]  21.9,81.05 270 top
R99  1M  [R0402]  30.7,81.9 180 top
R100  1M  [R0402]  22,87 270 top
R101  1M  [R0402]  33.5,90 90 top
R102  1M  [R0402]  22,57.05 270 top
R103  1M  [R0402]  33.5,60 90 top
R104  1M  [R0402]  22.1,63.05 270 top
R105  1M  [R0402]  30.7,63.8 180 top
R106  1M  [R0402]  22,69.05 270 top
R107  1M  [R0402]  33.5,71.9 90 top
R108  1M  [R0402]  22,39.05 270 top
R109  1M  [R0402]  33.5,42 90 top
R110  1M  [R0402]  22,45 270 top
R111  1M  [R0402]  30.7,45.7 180 top
R112  1M  [R0402]  22,50.95 270 top
R113  1M  [R0402]  33.6,54 90 top
R114  PLACEHOLDER  [R0603]  27.7,36.1 270 bottom
R115  PLACEHOLDER  [R0603]  27.8,93.5 270 bottom
R116  82?  [R0805]  96.5,48 270 bottom
R117  82?  [R0805]  96.5,58 270 bottom
R118  82  [R0805]  93.4,13.4 90 bottom
R119  82  [R0805]  93.5,33.3 90 bottom
R120  0R  [R0603]  94.2,54.6 270 bottom
R121  10k  [R0603]  61.8,51.3 90 top
R122  10k  [R0603]  60.4,54.3 270 top
R123  36k  [R0603]  61.7,54.3 90 top
R124  36k  [R0603]  60.4,51.3 270 top
R125  120  [R0805]  61.9,57.5 90 top
R126  100  [R0402]  61,6 180 bottom
R127  100  [R0402]  58.44,14.4 30 top
R128  100  [R0402]  63.3,6.62 0 top
R129  100  [R0402]  57.32,16.45 150 bottom
R130  100  [R0402]  63.3,3.27 0 top
R131  100  [R0402]  57,16.63 30 top
R132  100  [R0402]  61,4.1 180 bottom
R133  100  [R0402]  56.31,18.07 150 bottom
R134  3.32k  [R0402]  80,70.7 270 top
R135  1.02k  [R0402]  78.9,70.7 90 top
R136  36k  [R0603]  83,48.5 0 bottom
R137  10k  [R0603]  83,47 180 bottom
R138  10k  [R0402]  55.7,12 180 top
R139  10k  [R0402]  55.7,10.85 180 top
R140  2M  [R0402]  47.3,18 270 bottom
R141  2M  [R0402]  48.4,18 270 bottom
R142  2M  [R0402]  46.2,18 270 bottom
R143  2M  [R0402]  45.1,18 270 bottom
R144  510k  [R0402]  47,24 90 bottom
R145  510k  [R0402]  45,24 90 bottom
R146  510k  [R0402]  47,42 90 bottom
R147  510k  [R0402]  45,42 90 bottom
R148  510k  [R0402]  47,60 90 bottom
R149  510k  [R0402]  45,60 90 bottom
R150  510k  [R0402]  47,78 90 bottom
R151  510k  [R0402]  45,78 90 bottom
R152  510k  [R0402]  47,95.5 90 bottom
R153  510k  [R0402]  45,95.5 90 bottom
R154  10k  [R0402]  69.4,35.6 180 top
R155  10k  [R0402]  51.3,11.9 180 bottom
R157  10k  [R0402]  53,30.8 180 bottom
R158  10k  [R0402]  53,48.8 0 bottom
R159  10k  [R0402]  53,84.8 180 bottom
R160  10k  [R0402]  53,102.8 180 bottom
R161  10k  [R0402]  53,66.8 0 bottom
SW1  BALANCE  [TL1290]  95.5,32.5 270 top
SW2  GP_BUTTON  [TL1290]  95.5,12.5 270 top
SW3  [B3F-3XXX]  78,110 180 top
U$1  CURRENT-C-LETTER-LANDSCAPE  [BLANK]  83.31,108.55 0 top
U$2  CURRENT-C-LETTER-LANDSCAPE  [BLANK]  80.77,108.55 0 top
U$3  CURRENT-C-LETTER-LANDSCAPE  [BLANK]  19.73,88.05 0 top
U$4  CURRENT-C-LETTER-LANDSCAPE  [BLANK]  78.19,108.05 0 top
U$5  CURRENT-C-LETTER-LANDSCAPE  [BLANK]  78.15,109.05 0 top
U$6  CURRENT-C-LETTER-LANDSCAPE  [BLANK]  78.61,110.05 0 top
U$7  CURRENT-C-LETTER-LANDSCAPE  [BLANK]  82.75,-0.6 0 top
U$8  CURRENT-C-LETTER-LANDSCAPE  [BLANK]  78.57,107.05 0 top
U$9  CURRENT-C-LETTER-LANDSCAPE  [BLANK]  100.1,46.25 90 top
U$10  CURRENT-C-LETTER-LANDSCAPE  [BLANK]  76.4,73.6 0 top
U$11  HV_SYMBOL  [HV_SYMBOL]  9.5,17 0 top
U$12  CURRENT-C-LETTER-LANDSCAPE  [BLANK]  80,37.5 0 bottom
U$13  CURRENT-C-LETTER-LANDSCAPE  [BLANK]  -3,67.5 0 bottom
U$14  CURRENT-C-LETTER-LANDSCAPE  [BLANK]  -2.8,0.4 0 top
U$15  CURRENT-C-LETTER-LANDSCAPE  [BLANK]  -2.9,0.9 0 top
U$16  CURRENT-C-LETTER-LANDSCAPE  [BLANK]  -2.8,1.4 0 top
U$17  CURRENT-C-LETTER-LANDSCAPE  [BLANK]  -2.7,2.1 0 top
U$18  CURRENT-C-LETTER-LANDSCAPE  [BLANK]  -3,2.5 0 top
U$19  CURRENT-C-LETTER-LANDSCAPE  [BLANK]  -2.2,2.5 0 top
U$20  CURRENT-C-LETTER-LANDSCAPE  [BLANK]  3.55,17.05 0 top
U$21  HV_SYMBOL  [HV_SYMBOL]  10.5,19.5 0 bottom
U$22  CURRENT-LOGO-0.5"  [CURRENT-0.5"]  17.45,96.6 0 bottom
U$23  A-SUBTLE  [A_SUBTLE]  68,74.5 90 bottom
X1  [ECX-53B]  76.96,30.9 225 top
X2  CAN2  [776276-1_AMPSEAL_8_VERT]  78,96 180 top
X3  CAN1  [776276-1_AMPSEAL_8_VERT]  78,56 180 top
X4  THERMISTORS  [MICROCLASP-20-DUAL-RA]  9,85 90 top
X5  [MICROCLASP-38-DUAL-RA]  9,47 90 top
X6  JTAG  [TI_JTAG_HEADER]  77.5,39.5 180 bottom

## Library data of the parts
C1-C72 C74 C117 C120 C123 C126 C129 C132 C135 C138 C141 C144 C147 C157-C162 C168-C172 C175 = rcl; PARTNO: C1608X7R1E104K080AA
C73 C76 C118 C119 C122 C124 C125 C128 C130 C131 C134 C136 C137 C140 C142 C143 C146 C148-C154 C180 = rcl; PARTNO: GRM188R61E225KA12D
C75 C121 C127 C133 C139 C145 = rcl; PARTNO: GRM21BR61C106KE15L
C77-C116 = rcl; PARTNO: 04025A330JAT2A
C155 C156 = rcl; PARTNO: C1608C0G1H080D080AA
C163-C167 = rcl; PARTNO: C1608C0G1H471J080AA
C173 C174 = rcl; PARTNO: GRM188R60J106ME47D
C181-C188 = rcl; DNP: T
C189 = rcl; PARTNO: GRM32RR71H105KA01L
C190 C191 = rcl; PARTNO: GRM21BR60J226ME39L
C192 = rcl; PARTNO: C1608X5R1C105K
C193 = rcl; PARTNO: UUD1A102MNL1GS
D1-D10 D73 D74 = Diodes Inc; PARTNO: BZX84C5V1TS-7-F
D11-D16 D37-D66 = Diodes; PARTNO: MMSZ5231B
D17 = Diodes; PARTNO: B130-13-F
D18 = diode; PARTNO: STPS0560Z
IC1-IC6 = TI; PARTNO: BQ76PL536APAPT
IC7 = TI; PARTNO: TMS320F28035PNT
IC8 IC9 = TI; PARTNO: ISO7241CDW
IC10 = Analog Devices; PARTNO: ADG719BRTZ
IC11 = BMC components; PARTNO: ADUM5000ARWZ
IC12 = TI; PARTNO: SN74AHC1G86DBVR
IC13 IC14 = TI; PARTNO: SN74LVC2G07DBVR
IC15 = TI; PARTNO: LMR14206XMKE/NOPB
IC16 = BMC components; PARTNO: SN65HVD230D
IC17 = Recom; PARTNO: R-78C3.3-1.0
L1-L4 = Passives; PARTNO: BKP1608HS600-T
L5 = Bourns; PARTNO: SDR0604-180YL
LED1-LED6 = led; PARTNO: HSMH-C190
LED9 LED10 = Bivar; PARTNO: SMS1105PGC
Q1-Q42 = Fairchild Semiconductor; PARTNO: FDV301N
R1-R5 R10-R14 R79 = Panasonic; PARTNO: EXB-2HV102JV
R6 R8 R16 R18 R39 R41 = rcl; PARTNO: RC0402FR-071K82L
R7 R9 R15 R17 R19 R40 R42 R80 R82 R84 R85 R87 R89 R90 R92 R94 R95 = rcl; PARTNO: ERJ-2RKF1471X
R20 = rcl; PARTNO: CRCW06031K47FKEA
R21-R38 R96-R113 = rcl; PARTNO: RC0402JR-071ML
R43-R78 = rcl; PARTNO: ERJ-14YJ470U
R81 R83 R86 R88 R91 R93 = rcl; PARTNO: CRCW06031K82FKEA
R114 R115 = rcl; PARTNO: ERT-J1VG103FA
R116-R119 = resistor; PARTNO: ERJ-6GEYJ820V
R120 = resistor; PARTNO: CRCW06030000Z0EA
R121 = resistor; PARTNO: RC0603JR-1010KL
R122 = resistor; PARTNO: RC0603FR-0720KL
R123 R124 = resistor; PARTNO: RC0603FR-0736KL
R125 = resistor; PARTNO: RC0805FR-07120RL
R126-R133 = rcl; PARTNO: RC0402FR-13100RL
R134 = rcl; PARTNO: RR0510P-3321-D
R135 = rcl; PARTNO: CRCW04021K00JNTD
R136 = rcl; PARTNO: RC0603FR-0736KL
R137 R155 R157-R161 = rcl; PARTNO: RC0603JR-1010KL
R138 R139 R154 = rcl; PARTNO: ERJ-2RKF1002X
R140-R143 = rcl; PARTNO: CRCW04022M00FKED
R144-R153 = rcl; PARTNO: RC0402FR-07510KL
SW1 = E-Switch; PARTNO: TL1290AF400RR
SW2 = E-Switch; PARTNO: TL1290AF400BR
SW3 = Omron; PARTNO: B3F-3152
U$1-U$10 U$12-U$20 = Frames; BOM: EXCLUDE
U$11 U$21 U$22 = Logos; BOM: EXCLUDE
U$23 = Aaron-logos; BOM: EXCLUDE
X1 = Crystals; PARTNO: ECS-100-8-30B-CKM
X2 X3 = TE-Aaron; PARTNO: 1-776276-1
X4 = Molex-Aaron; PARTNO: 55959-2030
X5 = Molex-Aaron; PARTNO: 55959-3830
X6 = TI; PARTNO: 67996-114HLF

## Nets
1-ALERT_H: IC1.38 R131.1
1-ALERT_N: C77.1 IC1.57 R10.11
1-CB1: D42.CATHODE IC1.12 Q6.1 R21.1
1-CB2: D41.CATHODE IC1.10 Q5.1 R22.1
1-CB3: D40.CATHODE IC1.8 Q4.1 R23.1
1-CB4: D39.CATHODE IC1.6 Q3.1 R24.1
1-CB5: D38.CATHODE IC1.4 Q2.1 R25.1
1-CB6: D37.CATHODE IC1.2 Q1.1 R26.1
1-CONV_H: IC1.36 R127.1
1-CONV_N: C84.1 IC2.21 R10.8
1-CS_H: IC1.43 R132.1
1-CS_N: C81.1 IC2.29 R10.1
1-DRDY_H: IC1.37 R129.1
1-DRDY_N: C78.1 IC1.58 R10.10
1-FAULT_H: IC1.39 R133.1
1-FAULT_N: C79.1 IC1.56 R10.12
1-LDOA: C73.1 C74.1 IC1.17
1-LDOD: C76.1 C117.1 IC1.18 IC1.46
1-REG50: C118.1 IC1.32 LED1.A R138.1 R139.1 R155.2 X4.2 X4.11
1-SCLK_H: IC1.40 R128.1 R139.2
1-SCLK_N: C83.1 IC2.26 R10.4
1-SDI_H: IC1.42 R130.1 R138.2
1-SDI_N: C82.1 IC2.28 R10.2
1-SDO_H: IC1.41 R126.1
1-SDO_N: C80.1 IC1.54 R10.14
1-TS1: R7.2 X4.1
1-TS2: R9.2 X4.12
1-VREF: C75.1 IC1.16
2-ALERT_N: C101.1 IC2.57 R11.11
2-CB1: D66.CATHODE IC2.12 Q30.1 R27.1
2-CB2: D65.CATHODE IC2.10 Q29.1 R28.1
2-CB3: D64.CATHODE IC2.8 Q28.1 R29.1
2-CB4: D63.CATHODE IC2.6 Q27.1 R30.1
2-CB5: D62.CATHODE IC2.4 Q26.1 R31.1
2-CB6: D61.CATHODE IC2.2 Q25.1 R32.1
2-CONV_N: C88.1 IC3.21 R11.8
2-CS_N: C85.1 IC3.29 R11.1
2-DRDY_N: C102.1 IC2.58 R11.10
2-FAULT_N: C103.1 IC2.56 R11.12
2-GPIO: IC2.45 Q39.1 R157.1
2-LDOA: C119.1 C120.1 IC2.17
2-LDOD: C122.1 C123.1 IC2.18 IC2.46
2-REG50: C124.1 IC2.32 IC2.44 LED3.A R114.2 R144.1 R145.1 R157.2 X4.3
2-SCLK_N: C87.1 IC3.26 R11.4
2-SDI_N: C86.1 IC3.28 R11.2
2-SDO_N: C104.1 IC2.54 R11.14
2-TS1: R40.2 X4.13
2-TS2: R42.2 R114.1
2-VREF: C121.1 IC2.16
3-ALERT_N: C105.1 IC3.57 R12.11
3-CB1: D60.CATHODE IC3.12 Q24.1 R108.1
3-CB2: D59.CATHODE IC3.10 Q23.1 R109.1
3-CB3: D58.CATHODE IC3.8 Q22.1 R110.1
3-CB4: D57.CATHODE IC3.6 Q21.1 R111.1
3-CB5: D56.CATHODE IC3.4 Q20.1 R112.1
3-CB6: D55.CATHODE IC3.2 Q19.1 R113.1
3-CONV_N: C92.1 IC4.21 R12.8
3-CS_N: C89.1 IC4.29 R12.1
3-DRDY_N: C106.1 IC3.58 R12.10
3-FAULT_N: C107.1 IC3.56 R12.12
3-GPIO: IC3.45 Q40.1 R158.1
3-LDOA: C125.1 C126.1 IC3.17
3-LDOD: C128.1 C129.1 IC3.18 IC3.46
3-REG50: C130.1 IC3.32 IC3.44 LED4.A R146.1 R147.1 R158.2 X4.4 X4.5
3-SCLK_N: C91.1 IC4.26 R12.4
3-SDI_N: C90.1 IC4.28 R12.2
3-SDO_N: C108.1 IC3.54 R12.14
3-TS1: R82.2 X4.14
3-TS2: R84.2 X4.15
3-VREF: C127.1 IC3.16
4-ALERT_N: C109.1 IC4.57 R13.11
4-CB1: D54.CATHODE IC4.12 Q18.1 R102.1
4-CB2: D53.CATHODE IC4.10 Q17.1 R103.1
4-CB3: D52.CATHODE IC4.8 Q16.1 R104.1
4-CB4: D51.CATHODE IC4.6 Q15.1 R105.1
4-CB5: D50.CATHODE IC4.4 Q14.1 R106.1
4-CB6: D49.CATHODE IC4.2 Q13.1 R107.1
4-CONV_N: C96.1 IC5.21 R13.8
4-CS_N: C93.1 IC5.29 R13.1
4-DRDY_N: C110.1 IC4.58 R13.10
4-FAULT_N: C111.1 IC4.56 R13.12
4-GPIO: IC4.45 Q41.1 R161.1
4-LDOA: C131.1 C132.1 IC4.17
4-LDOD: C134.1 C135.1 IC4.18 IC4.46
4-REG50: C136.1 IC4.32 IC4.44 LED5.A R148.1 R149.1 R161.2 X4.6 X4.7
4-SCLK_N: C95.1 IC5.26 R13.4
4-SDI_N: C94.1 IC5.28 R13.2
4-SDO_N: C112.1 IC4.54 R13.14
4-TS1: R87.2 X4.16
4-TS2: R89.2 X4.17
4-VREF: C133.1 IC4.16
5-ALERT_N: C113.1 IC5.57 R14.11
5-CB1: D48.CATHODE IC5.12 Q12.1 R96.1
5-CB2: D47.CATHODE IC5.10 Q11.1 R97.1
5-CB3: D46.CATHODE IC5.8 Q10.1 R98.1
5-CB4: D45.CATHODE IC5.6 Q9.1 R99.1
5-CB5: D44.CATHODE IC5.4 Q8.1 R100.1
5-CB6: D43.CATHODE IC5.2 Q7.1 R101.1
5-CONV_N: C100.1 IC6.21 R14.8
5-CS_N: C97.1 IC6.29 R14.1
5-DRDY_N: C114.1 IC5.58 R14.10
5-FAULT_N: C115.1 IC5.56 R14.12
5-GPIO: IC5.45 Q42.1 R159.1
5-LDOA: C137.1 C138.1 IC5.17
5-LDOD: C140.1 C141.1 IC5.18 IC5.46
5-REG50: C142.1 IC5.32 IC5.44 LED6.A R115.2 R150.1 R151.1 R159.2 X4.8
5-SCLK_N: C99.1 IC6.26 R14.4
5-SDI_N: C98.1 IC6.28 R14.2
5-SDO_N: C116.1 IC5.54 R14.14
5-TS1: R92.2 X4.18
5-TS2: R94.2 R115.1
5-VREF: C139.1 IC5.16
6-CB1: D16.CATHODE IC6.12 Q36.1 R33.1
6-CB2: D15.CATHODE IC6.10 Q35.1 R34.1
6-CB3: D14.CATHODE IC6.8 Q34.1 R35.1
6-CB4: D13.CATHODE IC6.6 Q33.1 R36.1
6-CB5: D12.CATHODE IC6.4 Q32.1 R37.1
6-CB6: D11.CATHODE IC6.2 Q31.1 R38.1
6-LDOA: C143.1 C144.1 IC6.17
6-LDOD: C146.1 C147.1 IC6.18 IC6.46
6-REG50: C148.1 IC6.32 IC6.44 LED2.A R152.1 R153.1 R160.2 X4.9 X4.10
6-TS1: R17.2 X4.19
6-TS1+: IC6.20 R16.2 R17.1
6-TS1-: IC6.19 R16.1
6-TS2: R19.2 X4.20
6-TS2+: IC6.61 R18.2 R19.1
6-TS2-: IC6.60 R18.1
6-VREF: C145.1 IC6.16
!ISO_INTERFACE_ENABLE: IC7.78 IC8.10 IC9.7 IC11.6
!TRST: IC7.10 R154.1 X6.2
!XRS: IC7.9
+3V3: C168.1 C169.1 C174.1 C175.1 C180.1 C190.1 C191.1 C193.+ IC8.16 IC9.1 IC10.2 IC11.1 IC11.7 IC12.5 IC13.5 IC14.5 IC16.3 IC17.3 L1.A L2.A L4.A L5.P$2 R116.2 R117.2 R118.2 R119.2 R134.2 X6.5
+3V3_ISO: C170.1 C171.1 C172.1 C173.1 IC8.1 IC8.7 IC9.10 IC9.16 IC11.10 IC11.16
+12V: D18.A R136.2 X2.2 X3.2
BALANCE_BUTTON: IC7.31 SW1.2
BQ_ALERT: IC7.69 IC8.13
BQ_CONV: IC7.75 IC8.11
BQ_CS: IC7.1 IC9.3
BQ_DRDY: IC7.74 IC8.12
BQ_FAULT: IC7.68 IC8.14
BQ_SCLK: IC7.77 IC9.5
BQ_SDI: IC7.80 IC9.4
BQ_SDO: IC7.76 IC9.6
CAN-RX: IC7.33 IC16.4
CAN-TX: IC7.32 IC16.1
CAN_RESET: IC7.40 SW3.2
CANH: IC10.5 IC16.7 X2.5 X3.5
CANL: IC16.6 R125.2 X2.4 X3.4
EMU0: X6.13
EMU1: X6.14
GND: C149.2 C150.2 C151.2 C152.2 C153.2 C154.2 C155.2 C156.2 C168.2 C169.2 C174.2 C175.2 C180.2 C189.2 C190.2 C191.2 C193.- D17.ANODE IC7.8 IC7.35 IC7.53 IC7.71 IC7.73 IC8.9 IC8.15 IC9.2 IC9.8 IC10.3 IC11.2 IC11.4 IC11.8 IC12.3 IC13.2 IC14.2 IC15.2 IC16.2 IC17.2 L3.A R120.2 R121.1 R122.1 R135.1 R137.1 R154.2 SW1.3 SW1.4 SW2.3 SW2.4 SW3.1 X2.6 X2.7 X3.6 X3.7 X6.4 X6.8 X6.10 X6.12
GP_BUTTON: IC7.79 SW2.2
LED0: IC7.34 IC14.1
LED1: IC7.39 IC14.3
LED_BALANCING: IC7.63 IC13.3
LED_GP: IC7.62 IC13.1
N$1: C1.1 D9.6 IC1.1 R1.16
N$2: C1.2 C2.1 D9.1 D9.5 IC1.3 R1.15
N$3: C2.2 C3.1 D9.2 D9.4 IC1.5 R1.14
N$4: C3.2 C4.1 D9.3 D10.6 IC1.7 R1.13
N$5: C4.2 C5.1 D10.1 D10.5 IC1.9 R1.12
N$6: C5.2 C6.1 D10.2 D10.4 IC1.11 R1.11
N$7: C6.2 D10.3 IC1.13 R1.10
N$8: IC2.19 R39.1
N$9: IC1.19 R6.1
N$10: IC1.20 R6.2 R7.1
N$11: IC1.61 R8.2 R9.1
N$12: IC1.60 R8.1
N$13: IC2.20 R39.2 R40.1
N$14: R119.1 SW1.5
N$15: C13.1 D7.6 IC2.1 R2.16
N$16: C13.2 C14.1 D7.1 D7.5 IC2.3 R2.15
N$17: C14.2 C15.1 D7.2 D7.4 IC2.5 R2.14
N$18: C15.2 C16.1 D7.3 D8.6 IC2.7 R2.13
N$19: C16.2 C17.1 D8.1 D8.5 IC2.9 R2.12
N$20: C17.2 C18.1 D8.2 D8.4 IC2.11 R2.11
N$21: C18.2 D8.3 IC2.13 R2.10
N$22: R118.1 SW2.5
N$23: Q37.3 R15.1
N$24: IC1.59 R10.9 R143.2
N$25: LED1.C R15.2
N$26: IC1.45 Q37.1 R155.1
N$27: IC1.55 R10.13 R142.2
N$28: IC2.61 R41.2 R42.1
N$29: C25.1 D5.6 IC3.1 R3.16
N$30: C25.2 C26.1 D5.1 D5.5 IC3.3 R3.15
N$31: C26.2 C27.1 D5.2 D5.4 IC3.5 R3.14
N$32: C27.2 C28.1 D5.3 D6.6 IC3.7 R3.13
N$33: C28.2 C29.1 D6.1 D6.5 IC3.9 R3.12
N$34: C29.2 C30.1 D6.2 D6.4 IC3.11 R3.11
N$35: C30.2 D6.3 IC3.13 R3.10
N$36: IC1.53 R10.15 R140.2
N$37: IC1.52 R10.16 R141.2
N$38: IC2.60 R41.1
N$39: IC13.4 SW1.6
N$40: IC13.6 SW2.6
N$41: Q38.3 R20.1
N$42: C153.1 IC7.36 L2.B
N$43: C37.1 D3.6 IC4.1 R4.16
N$44: C37.2 C38.1 D3.1 D3.5 IC4.3 R4.15
N$45: C38.2 C39.1 D3.2 D3.4 IC4.5 R4.14
N$46: C39.2 C40.1 D3.3 D4.6 IC4.7 R4.13
N$47: C40.2 C41.1 D4.1 D4.5 IC4.9 R4.12
N$48: C41.2 C42.1 D4.2 D4.4 IC4.11 R4.11
N$49: C42.2 D4.3 IC4.13 R4.10
N$50: C154.1 IC7.70 L1.B
N$51: C149.1 IC7.72
N$52: C150.1 IC7.54
N$53: IC2.24 R10.5
N$54: LED2.C R20.2
N$55: IC2.23 R10.6
N$56: IC6.45 Q38.1 R160.1
N$57: C49.1 D1.6 IC5.1 R5.16
N$58: C49.2 C50.1 D1.1 D1.5 IC5.3 R5.15
N$59: C50.2 C51.1 D1.2 D1.4 IC5.5 R5.14
N$60: C51.2 C52.1 D1.3 D2.6 IC5.7 R5.13
N$61: C52.2 C53.1 D2.1 D2.5 IC5.9 R5.12
N$62: C53.2 C54.1 D2.2 D2.4 IC5.11 R5.11
N$63: C54.2 D2.3 IC5.13 R5.10
N$64: IC2.22 R10.7 R145.2
N$65: IC2.27 R10.3 R144.2
N$68: Q39.3 R80.1
N$69: LED3.C R80.2
N$71: C61.1 D73.6 IC6.1 R79.16
N$72: C61.2 C62.1 D73.1 D73.5 IC6.3 R79.15
N$73: C62.2 C63.1 D73.2 D73.4 IC6.5 R79.14
N$74: C63.2 C64.1 D73.3 D74.6 IC6.7 R79.13
N$75: C64.2 C65.1 D74.1 D74.5 IC6.9 R79.12
N$76: C65.2 C66.1 D74.2 D74.4 IC6.11 R79.11
N$77: C66.2 D74.3 IC6.13 R79.10
N$78: IC3.19 R81.1
N$79: IC3.24 R11.5
N$80: IC3.20 R81.2 R82.1
N$81: IC3.23 R11.6
N$82: IC3.61 R83.2 R84.1
N$83: IC3.22 R11.7 R147.2
N$84: IC3.27 R11.3 R146.2
N$85: Q1.3 R43.1
N$86: Q2.3 R44.1
N$87: Q3.3 R45.1
N$88: Q4.3 R46.1
N$89: Q5.3 R47.1
N$90: Q6.3 R48.1
N$91: C151.1 IC7.7
N$92: C152.1 IC7.20 L4.B
N$93: IC7.21 L3.B
N$94: IC3.60 R83.1
N$96: C155.1 IC7.52 X1.3
N$97: C156.1 IC7.51 X1.1
N$98: Q7.3 R49.1
N$99: Q8.3 R50.1
N$100: Q9.3 R51.1
N$101: Q10.3 R52.1
N$102: Q11.3 R53.1
N$103: Q12.3 R54.1
N$105: Q40.3 R85.1
N$106: LED4.C R85.2
N$108: IC4.19 R86.1
N$109: IC4.20 R86.2 R87.1
N$110: IC4.61 R88.2 R89.1
N$111: IC4.60 R88.1
N$112: C192.2 D17.CATHODE IC15.6 L5.P$1
N$114: Q41.3 R90.1
N$115: LED5.C R90.2
N$117: IC5.19 R91.1
N$118: IC5.20 R91.2 R92.1
N$119: IC5.61 R93.2 R94.1
N$120: IC5.60 R93.1
N$123: Q13.3 R55.1
N$124: Q14.3 R56.1
N$125: Q15.3 R57.1
N$126: Q16.3 R58.1
N$127: Q17.3 R59.1
N$128: Q18.3 R60.1
N$129: Q42.3 R95.1
N$130: LED6.C R95.2
N$131: IC14.6 LED10.CATHODE
N$132: LED10.ANODE R117.1
N$133: IC14.4 LED9.CATHODE
N$134: LED9.ANODE R116.1
N$135: IC16.8 R120.1
N$136: IC10.1 IC12.4
N$138: IC10.6 R125.1
N$140: C184.1 IC9.14 R132.2
N$141: IC12.2 R121.2 R124.1
N$142: Q19.3 R61.1
N$143: Q20.3 R62.1
N$144: Q21.3 R63.1
N$145: Q22.3 R64.1
N$146: Q23.3 R65.1
N$147: Q24.3 R66.1
N$148: IC12.1 R122.2 R123.1
N$149: C183.1 IC9.13 R130.2
N$150: C182.1 IC9.12 R128.2
N$151: C181.1 IC9.11 R126.2
N$152: C188.1 IC8.3 R133.2
N$153: C187.1 IC8.4 R131.2
N$154: C186.1 IC8.5 R129.2
N$155: C185.1 IC8.6 R127.2
N$156: IC15.3 R134.1 R135.2
N$159: C189.1 D18.C IC15.4 IC15.5 IC17.1
N$161: Q25.3 R67.1
N$162: Q26.3 R68.1
N$163: Q27.3 R69.1
N$164: Q28.3 R70.1
N$165: Q29.3 R71.1
N$166: Q30.3 R72.1
N$168: C192.1 IC15.1
N$180: Q31.3 R73.1
N$181: Q32.3 R74.1
N$182: Q33.3 R75.1
N$183: Q34.3 R76.1
N$184: Q35.3 R77.1
N$185: Q36.3 R78.1
N$205: IC4.24 R12.5
N$207: IC4.23 R12.6
N$209: IC4.22 R12.7 R149.2
N$210: IC4.27 R12.3 R148.2
N$217: IC5.24 R13.5
N$219: IC5.23 R13.6
N$221: IC5.22 R13.7 R151.2
N$222: IC5.27 R13.3 R150.2
N$229: IC6.24 R14.5
N$231: IC6.23 R14.6
N$233: IC6.22 R14.7 R153.2
N$234: IC6.27 R14.3 R152.2
N$242: IC2.59 R11.9
N$245: IC2.55 R11.13
N$247: IC2.53 R11.15
N$248: IC2.52 R11.16
N$254: IC3.59 R12.9
N$257: IC3.55 R12.13
N$259: IC3.53 R12.15
N$260: IC3.52 R12.16
N$266: IC4.59 R13.9
N$269: IC4.55 R13.13
N$271: IC4.53 R13.15
N$272: IC4.52 R13.16
N$278: IC5.59 R14.9
N$281: IC5.55 R14.13
N$283: IC5.53 R14.15
N$284: IC5.52 R14.16
PWROUT_INT: IC7.12 R136.1 R137.2
SHIELD: X2.1 X3.1
TCK: IC7.57 X6.9 X6.11
TDI: IC7.59 X6.3
TDO: IC7.58 X6.7
TERM-1: R124.2 X3.3
TERM-2: R123.2 X2.3
TMS: IC7.60 X6.1
VC1+: C11.2 C12.1 D41.ANODE Q5.2 R1.6 R22.2 R48.2 X5.20
VC1-: C12.2 C73.2 C74.2 C75.2 C76.2 C117.2 C118.2 C157.2 C167.2 C170.2 C171.2 C172.2 C173.2 C181.2 C182.2 C183.2 C184.2 C185.2 C186.2 C187.2 C188.2 D42.ANODE IC1.14 IC1.15 IC1.21 IC1.22 IC1.23 IC1.24 IC1.25 IC1.26 IC1.27 IC1.28 IC1.29 IC1.33 IC1.34 IC1.35 IC1.44 IC1.49 IC1.50 IC8.2 IC8.8 IC9.9 IC9.15 IC11.9 IC11.13 IC11.15 Q6.2 Q37.2 R1.7 R21.2 R140.1 R141.1 R142.1 R143.1 X5.1
VC2+: C10.2 C11.1 D40.ANODE Q4.2 R1.5 R23.2 R47.2 X5.2
VC3+: C9.2 C10.1 D39.ANODE Q3.2 R1.4 R24.2 R46.2 X5.21
VC4+: C8.2 C9.1 D38.ANODE Q2.2 R1.3 R25.2 R45.2 X5.3
VC5+: C7.2 C8.1 D37.ANODE Q1.2 R1.2 R26.2 R44.2 X5.22
VC6+: C7.1 C24.2 C77.2 C78.2 C79.2 C80.2 C81.2 C82.2 C83.2 C84.2 C119.2 C120.2 C121.2 C122.2 C123.2 C124.2 C157.1 C158.2 C166.2 C167.1 D66.ANODE IC1.63 IC1.64 IC2.14 IC2.15 IC2.25 IC2.33 IC2.34 IC2.35 IC2.49 IC2.50 Q30.2 Q39.2 R1.1 R2.7 R27.2 R43.2 X5.4
VC7+: C23.2 C24.1 D65.ANODE Q29.2 R2.6 R28.2 R72.2 X5.23
VC8+: C22.2 C23.1 D64.ANODE Q28.2 R2.5 R29.2 R71.2 X5.5
VC9+: C21.2 C22.1 D63.ANODE Q27.2 R2.4 R30.2 R70.2 X5.24
VC10+: C20.2 C21.1 D62.ANODE Q26.2 R2.3 R31.2 R69.2 X5.6
VC11+: C19.2 C20.1 D61.ANODE Q25.2 R2.2 R32.2 R68.2 X5.25
VC12+: C19.1 C36.2 C85.2 C86.2 C87.2 C88.2 C101.2 C102.2 C103.2 C104.2 C125.2 C126.2 C127.2 C128.2 C129.2 C130.2 C158.1 C159.2 C165.2 C166.1 D60.ANODE IC2.63 IC2.64 IC3.14 IC3.15 IC3.25 IC3.33 IC3.34 IC3.35 IC3.49 IC3.50 Q24.2 Q40.2 R2.1 R3.7 R67.2 R108.2 X5.7
VC13+: C35.2 C36.1 D59.ANODE Q23.2 R3.6 R66.2 R109.2 X5.26
VC14+: C34.2 C35.1 D58.ANODE Q22.2 R3.5 R65.2 R110.2 X5.8
VC15+: C33.2 C34.1 D57.ANODE Q21.2 R3.4 R64.2 R111.2 X5.27
VC16+: C32.2 C33.1 D56.ANODE Q20.2 R3.3 R63.2 R112.2 X5.9
VC17+: C31.2 C32.1 D55.ANODE Q19.2 R3.2 R62.2 R113.2 X5.28
VC18+: C31.1 C48.2 C89.2 C90.2 C91.2 C92.2 C105.2 C106.2 C107.2 C108.2 C131.2 C132.2 C133.2 C134.2 C135.2 C136.2 C159.1 C160.2 C164.2 C165.1 D54.ANODE IC3.63 IC3.64 IC4.14 IC4.15 IC4.25 IC4.33 IC4.34 IC4.35 IC4.49 IC4.50 Q18.2 Q41.2 R3.1 R4.7 R61.2 R102.2 X5.10
VC19+: C47.2 C48.1 D53.ANODE Q17.2 R4.6 R60.2 R103.2 X5.29
VC20+: C46.2 C47.1 D52.ANODE Q16.2 R4.5 R59.2 R104.2 X5.11
VC21+: C45.2 C46.1 D51.ANODE Q15.2 R4.4 R58.2 R105.2 X5.30
VC22+: C44.2 C45.1 D50.ANODE Q14.2 R4.3 R57.2 R106.2 X5.12
VC23+: C43.2 C44.1 D49.ANODE Q13.2 R4.2 R56.2 R107.2 X5.31
VC24+: C43.1 C60.2 C93.2 C94.2 C95.2 C96.2 C109.2 C110.2 C111.2 C112.2 C137.2 C138.2 C139.2 C140.2 C141.2 C142.2 C160.1 C161.2 C163.2 C164.1 D48.ANODE IC4.63 IC4.64 IC5.14 IC5.15 IC5.25 IC5.33 IC5.34 IC5.35 IC5.49 IC5.50 Q12.2 Q42.2 R4.1 R5.7 R55.2 R96.2 X5.13
VC25+: C59.2 C60.1 D47.ANODE Q11.2 R5.6 R54.2 R97.2 X5.32
VC26+: C58.2 C59.1 D46.ANODE Q10.2 R5.5 R53.2 R98.2 X5.14
VC27+: C57.2 C58.1 D45.ANODE Q9.2 R5.4 R52.2 R99.2 X5.33
VC28+: C56.2 C57.1 D44.ANODE Q8.2 R5.3 R51.2 R100.2 X5.15
VC29+: C55.2 C56.1 D43.ANODE Q7.2 R5.2 R50.2 R101.2 X5.34
VC30+: C55.1 C72.2 C97.2 C98.2 C99.2 C100.2 C113.2 C114.2 C115.2 C116.2 C143.2 C144.2 C145.2 C146.2 C147.2 C148.2 C161.1 C162.2 C163.1 D16.ANODE IC5.63 IC5.64 IC6.14 IC6.15 IC6.25 IC6.33 IC6.34 IC6.35 IC6.49 IC6.50 Q36.2 Q38.2 R5.1 R33.2 R49.2 R79.7 X5.16
VC31+: C71.2 C72.1 D15.ANODE Q35.2 R34.2 R78.2 R79.6 X5.35
VC32+: C70.2 C71.1 D14.ANODE Q34.2 R35.2 R77.2 R79.5 X5.17
VC33+: C69.2 C70.1 D13.ANODE Q33.2 R36.2 R76.2 R79.4 X5.36
VC34+: C68.2 C69.1 D12.ANODE Q32.2 R37.2 R75.2 R79.3 X5.18
VC35+: C67.2 C68.1 D11.ANODE Q31.2 R38.2 R74.2 R79.2 X5.37
VC36+: C67.1 C162.1 IC6.52 IC6.53 IC6.54 IC6.55 IC6.56 IC6.57 IC6.58 IC6.59 IC6.63 IC6.64 R73.2 R79.1 X5.19

## Tracks (layer width: path | path; a pad name or v marks a point on that pad's centre or on a via)
1-ALERT_H  (via drill 0.25)
  Top 0.178: IC1.38 v52.9,10.75 | v55.5,16 55.81,16.31 R131.1
  Route2 0.178: v52.9,10.75 53.85,10.75 55.3,12.2 55.3,15.8 v55.5,16
1-ALERT_N  (via drill 0.25)
  Top 0.127: R10.11 45.75,20.75 45.5,21 43.7,21 v43.5,20.8
  Top 0.178: IC1.57 R10.11
  Bottom 0.178: v43.5,20.8 C77.1
1-CB1  (via drill 0.25)
  Top 0.178: v41.6,10.25 IC1.12 | 23.4,3.9 22.25,3.9 R21.1 | 23.4,3.9 25.5,3.9 | 25.5,3.9 v26.5,3.9 | D42.CATHODE 23.5,4 23.4,3.9 | Q6.1 25.45,3.95 25.5,3.9
  Route2 0.178: v41.6,10.25 39.45,10.25 38.45,9.25 35.75,9.25 35.4,8.9 35.4,5.1 34.2,3.9 v26.5,3.9
1-CB2  (via drill 0.25)
  Top 0.178: v41.6,11.25 IC1.10 | 32.1,5.2 30.3,5.2 Q5.1 | 32.1,5.2 v34.1,5.2 33.65,5.2 R22.1 | D41.CATHODE 32,5.1 32.1,5.2
  Route2 0.178: v41.6,11.25 39,11.25 38.45,10.7 36.4,10.7 34.9,9.2 34.9,6 v34.1,5.2
1-CB3  (via drill 0.25)
  Top 0.178: v41.6,12.25 IC1.8 | 23.4,9.8 22.15,9.8 R23.1 | 23.4,9.8 25.4,9.8 | 25.4,9.8 v26.5,9.8 | Q4.1 25.36,9.85 25.4,9.8 | 23.5,10 23.5,9.9 23.4,9.8
  Top 0.4: 23.5,10 D40.CATHODE
  Route2 0.178: v41.6,12.25 39.45,12.25 38.3,11.1 36,11.1 34.7,9.8 v26.5,9.8
1-CB4  (via drill 0.25)
  Top 0.178: v41.6,13.25 IC1.6 | R24.1 31.5,9.85 D39.CATHODE 31.39,11 30.2,11 Q3.1 30.9,11.8 v30.9,12.3
  Route2 0.178: v41.6,13.25 33.75,13.25 33.3,13.7 32.3,13.7 v30.9,12.3
1-CB5  (via drill 0.25)
  Top 0.178: v41.6,14.25 IC1.4 | 23.4,15.9 22.25,15.9 R25.1 | 23.4,15.9 25.4,15.9 | 25.4,15.9 v26.5,15.9 | D38.CATHODE 23.4,16.02 23.4,15.9 | Q2.1 25.4,15.9
  Route2 0.178: v41.6,14.25 39.35,14.25 38.9,13.8 35.4,13.8 33.3,15.9 v26.5,15.9
1-CB6  (via drill 0.25)
  Top 0.178: v41.6,15.25 IC1.2 | 32,17 30.2,17 Q1.1 | 32,17 33.4,17 | 33.4,17 v34.2,17 | R26.1 33.5,17.1 33.4,17 | 32,17 D37.CATHODE
  Route2 0.178: v41.6,15.25 35.95,15.25 v34.2,17
1-CONV_H  (via drill 0.25)
  Top 0.178: IC1.36 v52.9,9.75 | v56.9,13.6 57.37,14.07 R127.1
  Route2 0.178: v52.9,9.75 54.35,9.75 56.1,11.5 56.1,12.8 v56.9,13.6
1-CONV_N  (via drill 0.25)
  Top 0.178: IC2.21 44.25,23.35 44.7,22.9 44.7,21.79 R10.8 44.61,21.7 43.9,21.7 43.3,22.3 v42.75,22.3
  Bottom 0.178: C84.1 40.5,22.2 40.6,22.3 v42.75,22.3
1-CS_H  (via drill 0.25, 0.89 pad 1.5)
  Top 0.178: v50.5,13.05 50.7,13.25 IC1.43
  Route2 0.178: v57.4,3.5 57,3.9 53.6,3.9 51.2,6.3 51.2,12.9 51.05,13.05 v50.5,13.05
  Route15 0.254: v45.72,1.27 46.77,1.27 49,3.5 v57.4,3.5
  Bottom 0.178: v57.4,3.5 57.8,3.9 60.15,3.9 R132.1
1-CS_N  (via drill 0.25)
  Top 0.178: IC2.29 48.25,21.84 R10.1 v50.45,21.75
  Bottom 0.178: v50.45,21.75 50.9,21.75 C81.1
1-DRDY_H  (via drill 0.25)
  Top 0.178: IC1.37 v53.55,10.25
  Route2 0.178: v53.55,10.25 54.15,10.25 55.7,11.8 55.7,14 v56.4,14.7
  Bottom 0.178: v56.4,14.7 56.4,15.77 R129.1
1-DRDY_N  (via drill 0.25)
  Top 0.127: 45.25,20.55 45.1,20.7 44.2,20.7 43.8,20.3
  Top 0.178: IC1.58 R10.10 45.25,20.55 | 43.8,20.3 42.3,20.3 v42,20.7
  Bottom 0.178: v42,20.7 C78.1
1-FAULT_H  (via drill 0.25)
  Top 0.178: IC1.39 v53.55,11.25
  Route2 0.178: v53.55,11.25 54.9,12.6 v54.9,16.8
  Bottom 0.178: v54.9,16.8 54.9,16.89 R133.1
1-FAULT_N  (via drill 0.25)
  Top 0.127: R10.12 46.25,20.75 45.7,21.3 43.8,21.3 43.5,21.6 43,21.6 42.75,21.35 v42.75,21
  Top 0.178: R10.12 IC1.56
  Bottom 0.127: v42.75,21 42.75,19.85 42.9,19.7 44.35,19.7 C79.1
1-LDOA
  pour Top (no thermals): 39,4.3 39,5.3 40.8,7.1 42.4,7.1 42.4,5 41.8,4.4 39.1,4.4
1-LDOD  (via drill 0.25)
  Top 0.254: IC1.18 42.75,5.25 v43.7,4.3 | v50.5,14.8 51.55,14.8 IC1.46
  Route2 0.254: v43.7,4.3 44.6,5.2 44.6,6 45,6.4 49.5,6.4 v50.5,7.4
  Route15 0.254: v50.5,7.4 50.5,11.5 51.5,12.5 51.5,14.4 51.1,14.8 v50.5,14.8
  pour Top (no thermals): 54.2,15.5 53.1,15.5 52.5,14.9 50.9,14.9 50.8,14.8 50.8,14.7 50.9,14.6 52.4,14.6 52.5,14.5 52.5,14.1 53.2,13.4 54.2,13.4
1-REG50  (via drill 0.25)
  Top 0.178: IC1.32 49.75,6.25 v50.1,5.9 | v6.7,22.2 v17.8,22.2
  Top 0.254: R138.1 R139.1 v56.35,10
  Top 0.4: v53.35,16.35 53.75,16.75 LED1.A
  Route15 0.178: v50.1,5.9 38.2,5.9 37.1,7 37.1,10.2 36.5,10.8 36.2,10.8 35.9,11.1 35.9,19.5 34.9,20.5 29.5,20.5 29.4,20.4 28.7,20.4 28.6,20.5 20.3,20.5 18.6,22.2 v17.8,22.2 | v6.7,22.2 6.7,75.7 X4.2 11,76 X4.11
  Route15 0.254: v56.35,10 55.2,10 54.4,9.2 54.25,9.15
  Route15 0.4: v50.1,5.9 51.3,7.1 51.3,8.3 52.2,9.15 54.25,9.15 54.4,9.3 54.4,12.4 53.75,13.05 53.75,15.95 v53.35,16.35
  Bottom 0.254: R155.2 51.95,12.95 52.7,13.7 52.7,15.7 v53.35,16.35
  pour Top (no thermals): 49.6,7.1 49.6,5 50,4.6 50.7,4.6 50.7,6.5 50,7.1
1-SCLK_H  (via drill 0.25, 0.89 pad 1.5)
  Top 0.178: IC1.40 v52.9,11.75 53.95,11.75 54.7,11 54.9,11 R139.2 | v59,6.6 62.64,6.6 R128.1
  Route2 0.178: v52.9,11.75 52.65,11.75 52.4,11.5 52.4,7.1 52.9,6.6 v59,6.6
  Route15 0.254: v53.34,1.27 58.97,1.27 60.5,2.6 60.5,6 59.9,6.6 v59,6.6
1-SCLK_N  (via drill 0.25)
  Top 0.178: IC2.26 R10.4 46.75,21.35 v47,21.1
  Bottom 0.178: v47,21.1 46.7,21.4 46.7,21.45 C83.1
1-SDI_H  (via drill 0.25, 0.89 pad 1.5)
  Top 0.178: IC1.42 v52.9,12.75 54.45,12.75 55.05,12.15 R138.2 | R130.1 62.62,3.3 62.4,3.3 61.8,3.9 61.8,4.2 61.4,4.6 v58.9,4.6
  Route2 0.178: v52.9,12.75 51.85,12.75 51.6,12.5 51.6,6.5 53.8,4.3 58.6,4.3 v58.9,4.6
  Route15 0.254: v48.26,1.27 49.17,1.27 50.8,2.9 58.1,2.9 58.9,3.7 v58.9,4.6
1-SDI_N  (via drill 0.25)
  Top 0.178: IC2.28 R10.2 47.75,21.35 47.9,21.2 v48.8,21.2
  Bottom 0.178: v48.8,21.2 49.3,21.6 49.45,21.6 C82.1
1-SDO_H  (via drill 0.25, 0.89 pad 1.5)
  Top 0.178: v53.55,12.25 IC1.41
  Route2 0.178: v53.55,12.25 52.25,12.25 52,12 52,6.7 52.7,6 v59.5,6
  Route15 0.254: v50.8,1.27 51.77,1.27 52.8,2.3 59.4,2.3 60.1,3 60.1,5.4 v59.5,6
  Bottom 0.178: v59.5,6 R126.1
1-SDO_N  (via drill 0.25)
  Top 0.178: IC1.54 R10.14 47.25,20.55 47.5,20.8 48.5,20.8 arc-90 48.8,20.5 v48.8,19.5
  Bottom 0.178: v48.8,19.5 48.1,20.2 48.1,20.25 C80.1
1-TS1  (via drill 0.25)
  Top 0.178: v7.2,21.7 v18.3,21.7
  Route15 0.178: v36.5,7.2 36.5,9 35.5,10 35.5,19.4 34.8,20.1 29.7,20.1 29.6,20 28.6,20 28.5,20.1 19.9,20.1 v18.3,21.7 | v7.2,21.7 7.2,74.2 X4.1
  Bottom 0.178: R7.2 v36.49,7.19 v36.5,7.2
1-TS2  (via drill 0.25)
  Top 0.178: v6.2,22.7 v17.3,22.7
  Route15 0.127: 10.65,78.85 8.2,78.85 6.2,76.8
  Route15 0.178: v36.5,19.7 36.2,19.7 35,20.9 30.2,20.9 29.5,21.6 28.6,21.6 27.9,20.9 20.7,20.9 18.9,22.7 v17.3,22.7 | v6.2,22.7 6.2,76.8 | 10.65,78.85 X4.12
  Bottom 0.178: R9.2 v36.49,19.69 v36.5,19.7
1-VREF
  pour Top (no thermals): 36.9,5.3 38.2,5.3 41.1,8.2 41.1,8.4 39.5,8.4 38.3,7.2 37.4,7.2 36.9,6.7
2-ALERT_N  (via drill 0.25)